# Allegro board Proto-board-silk.brd
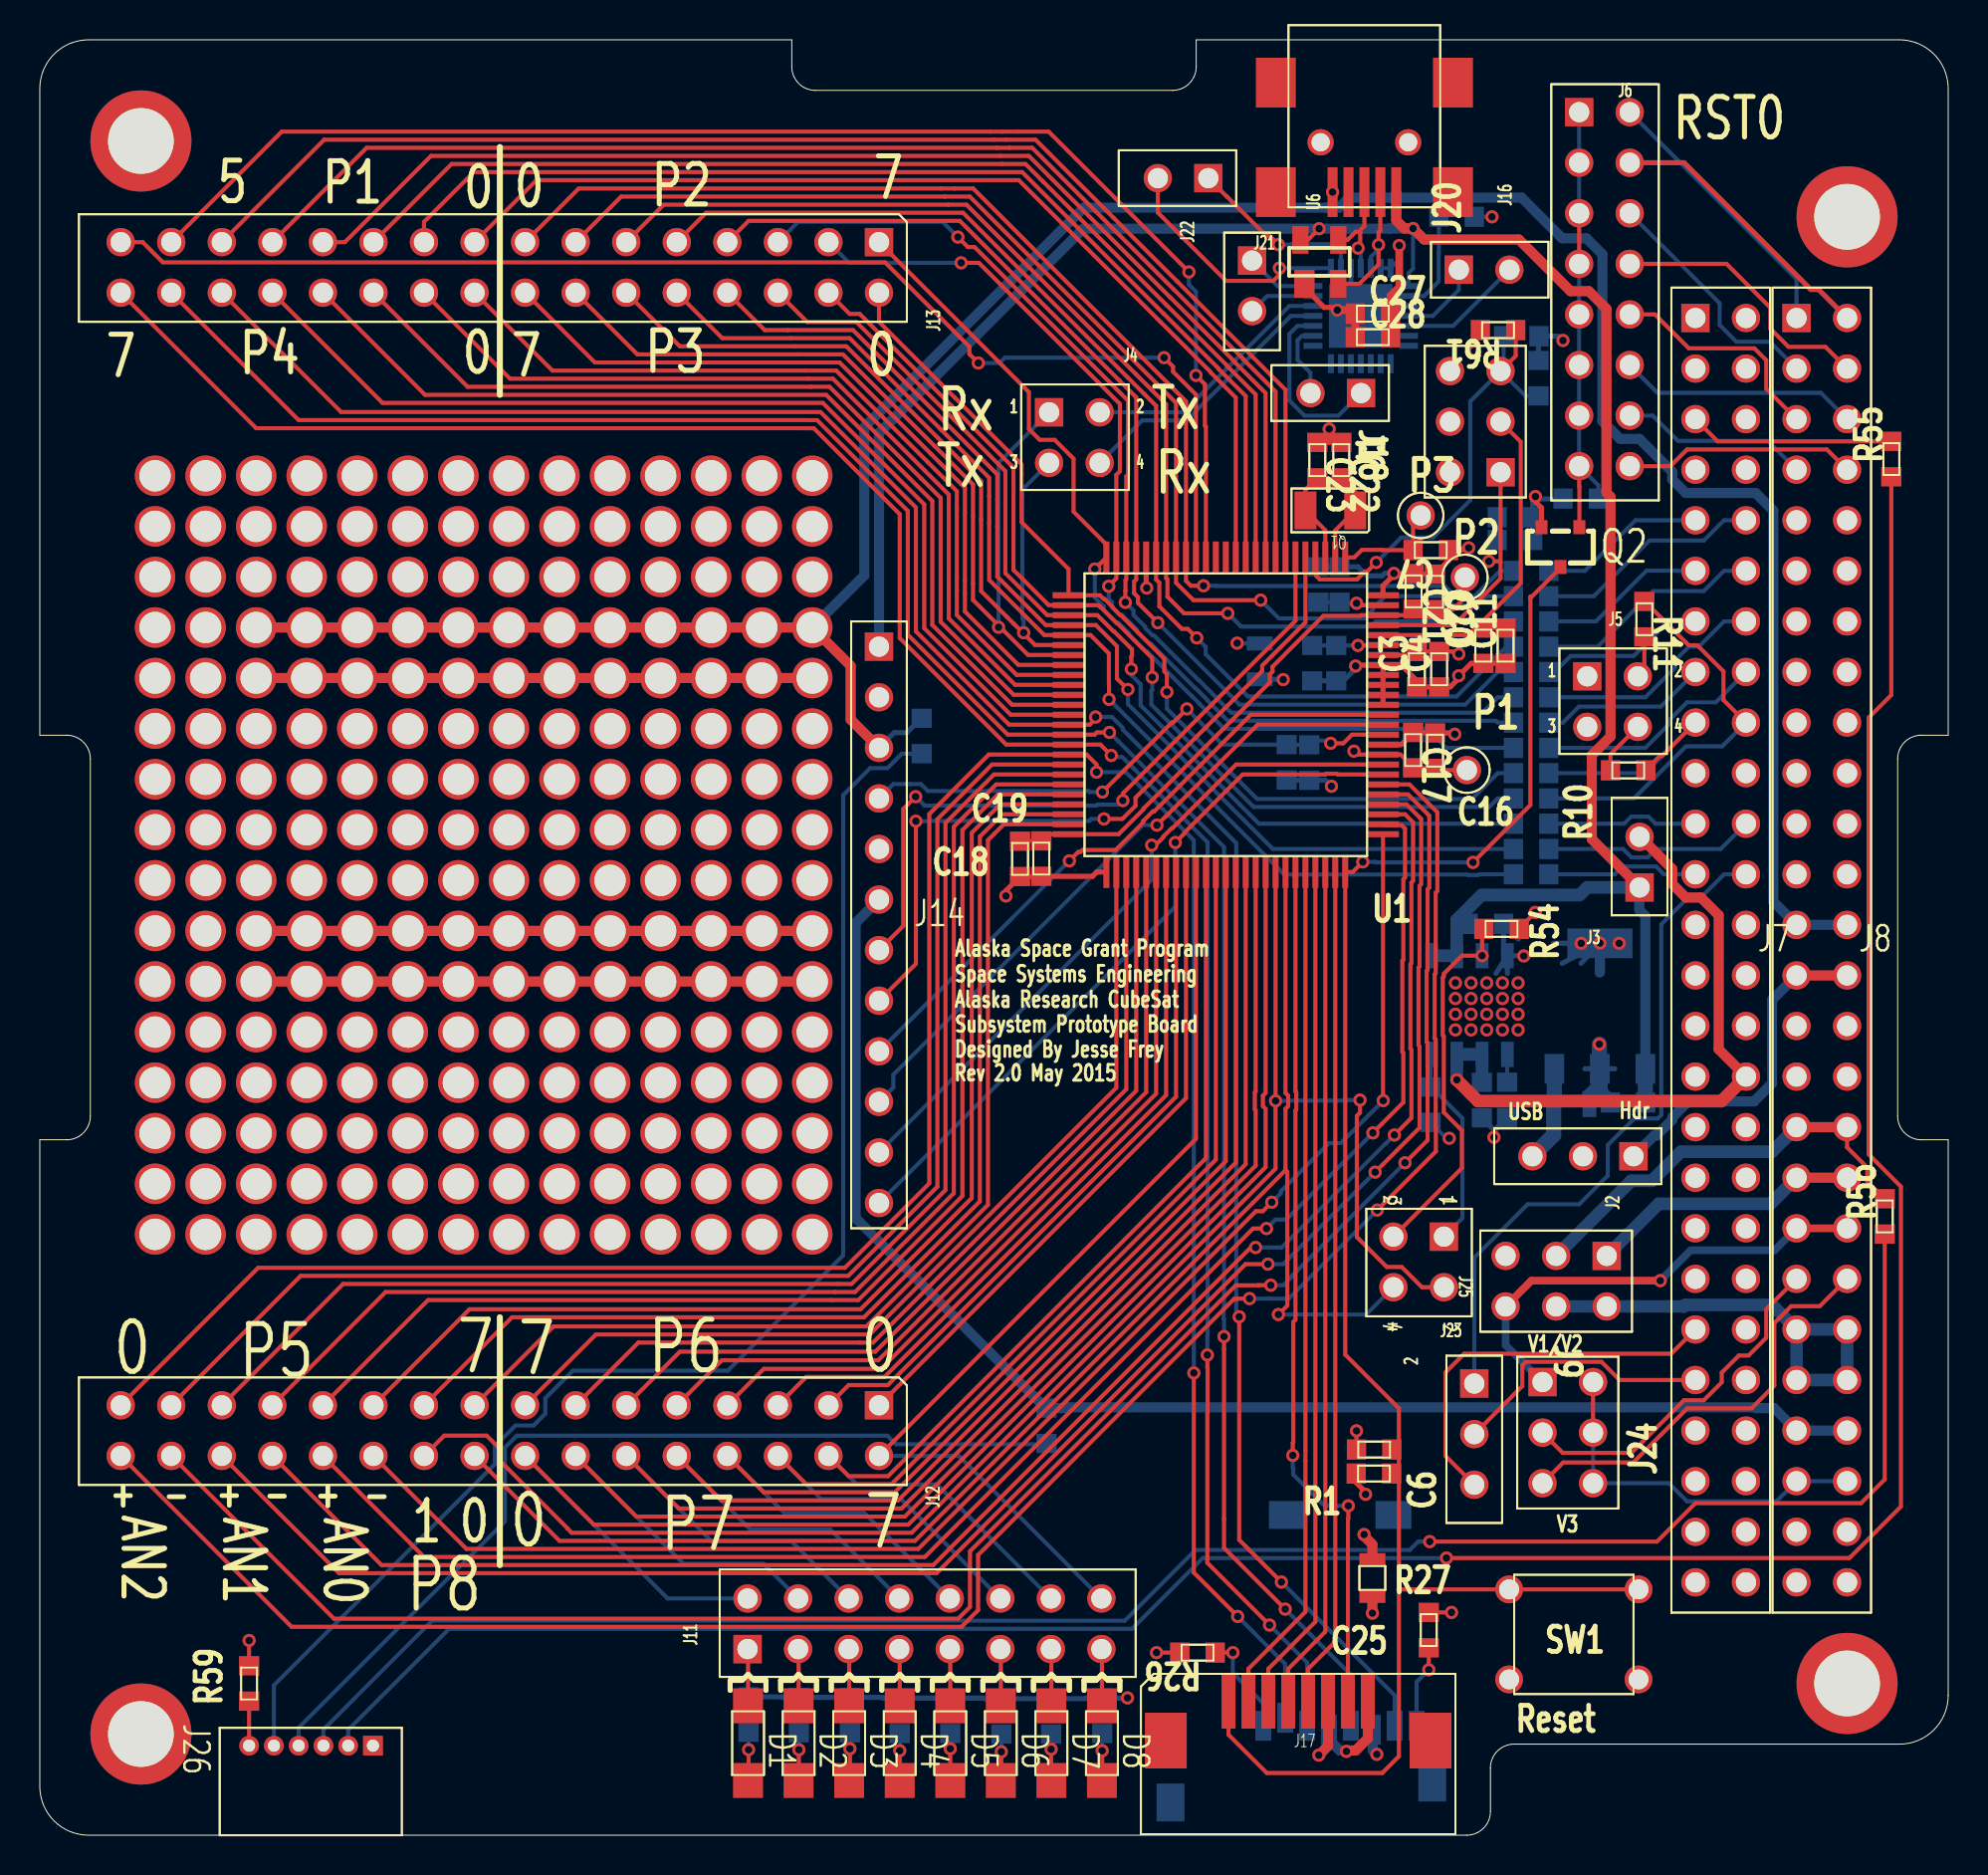
[diagram p0: board, top side]
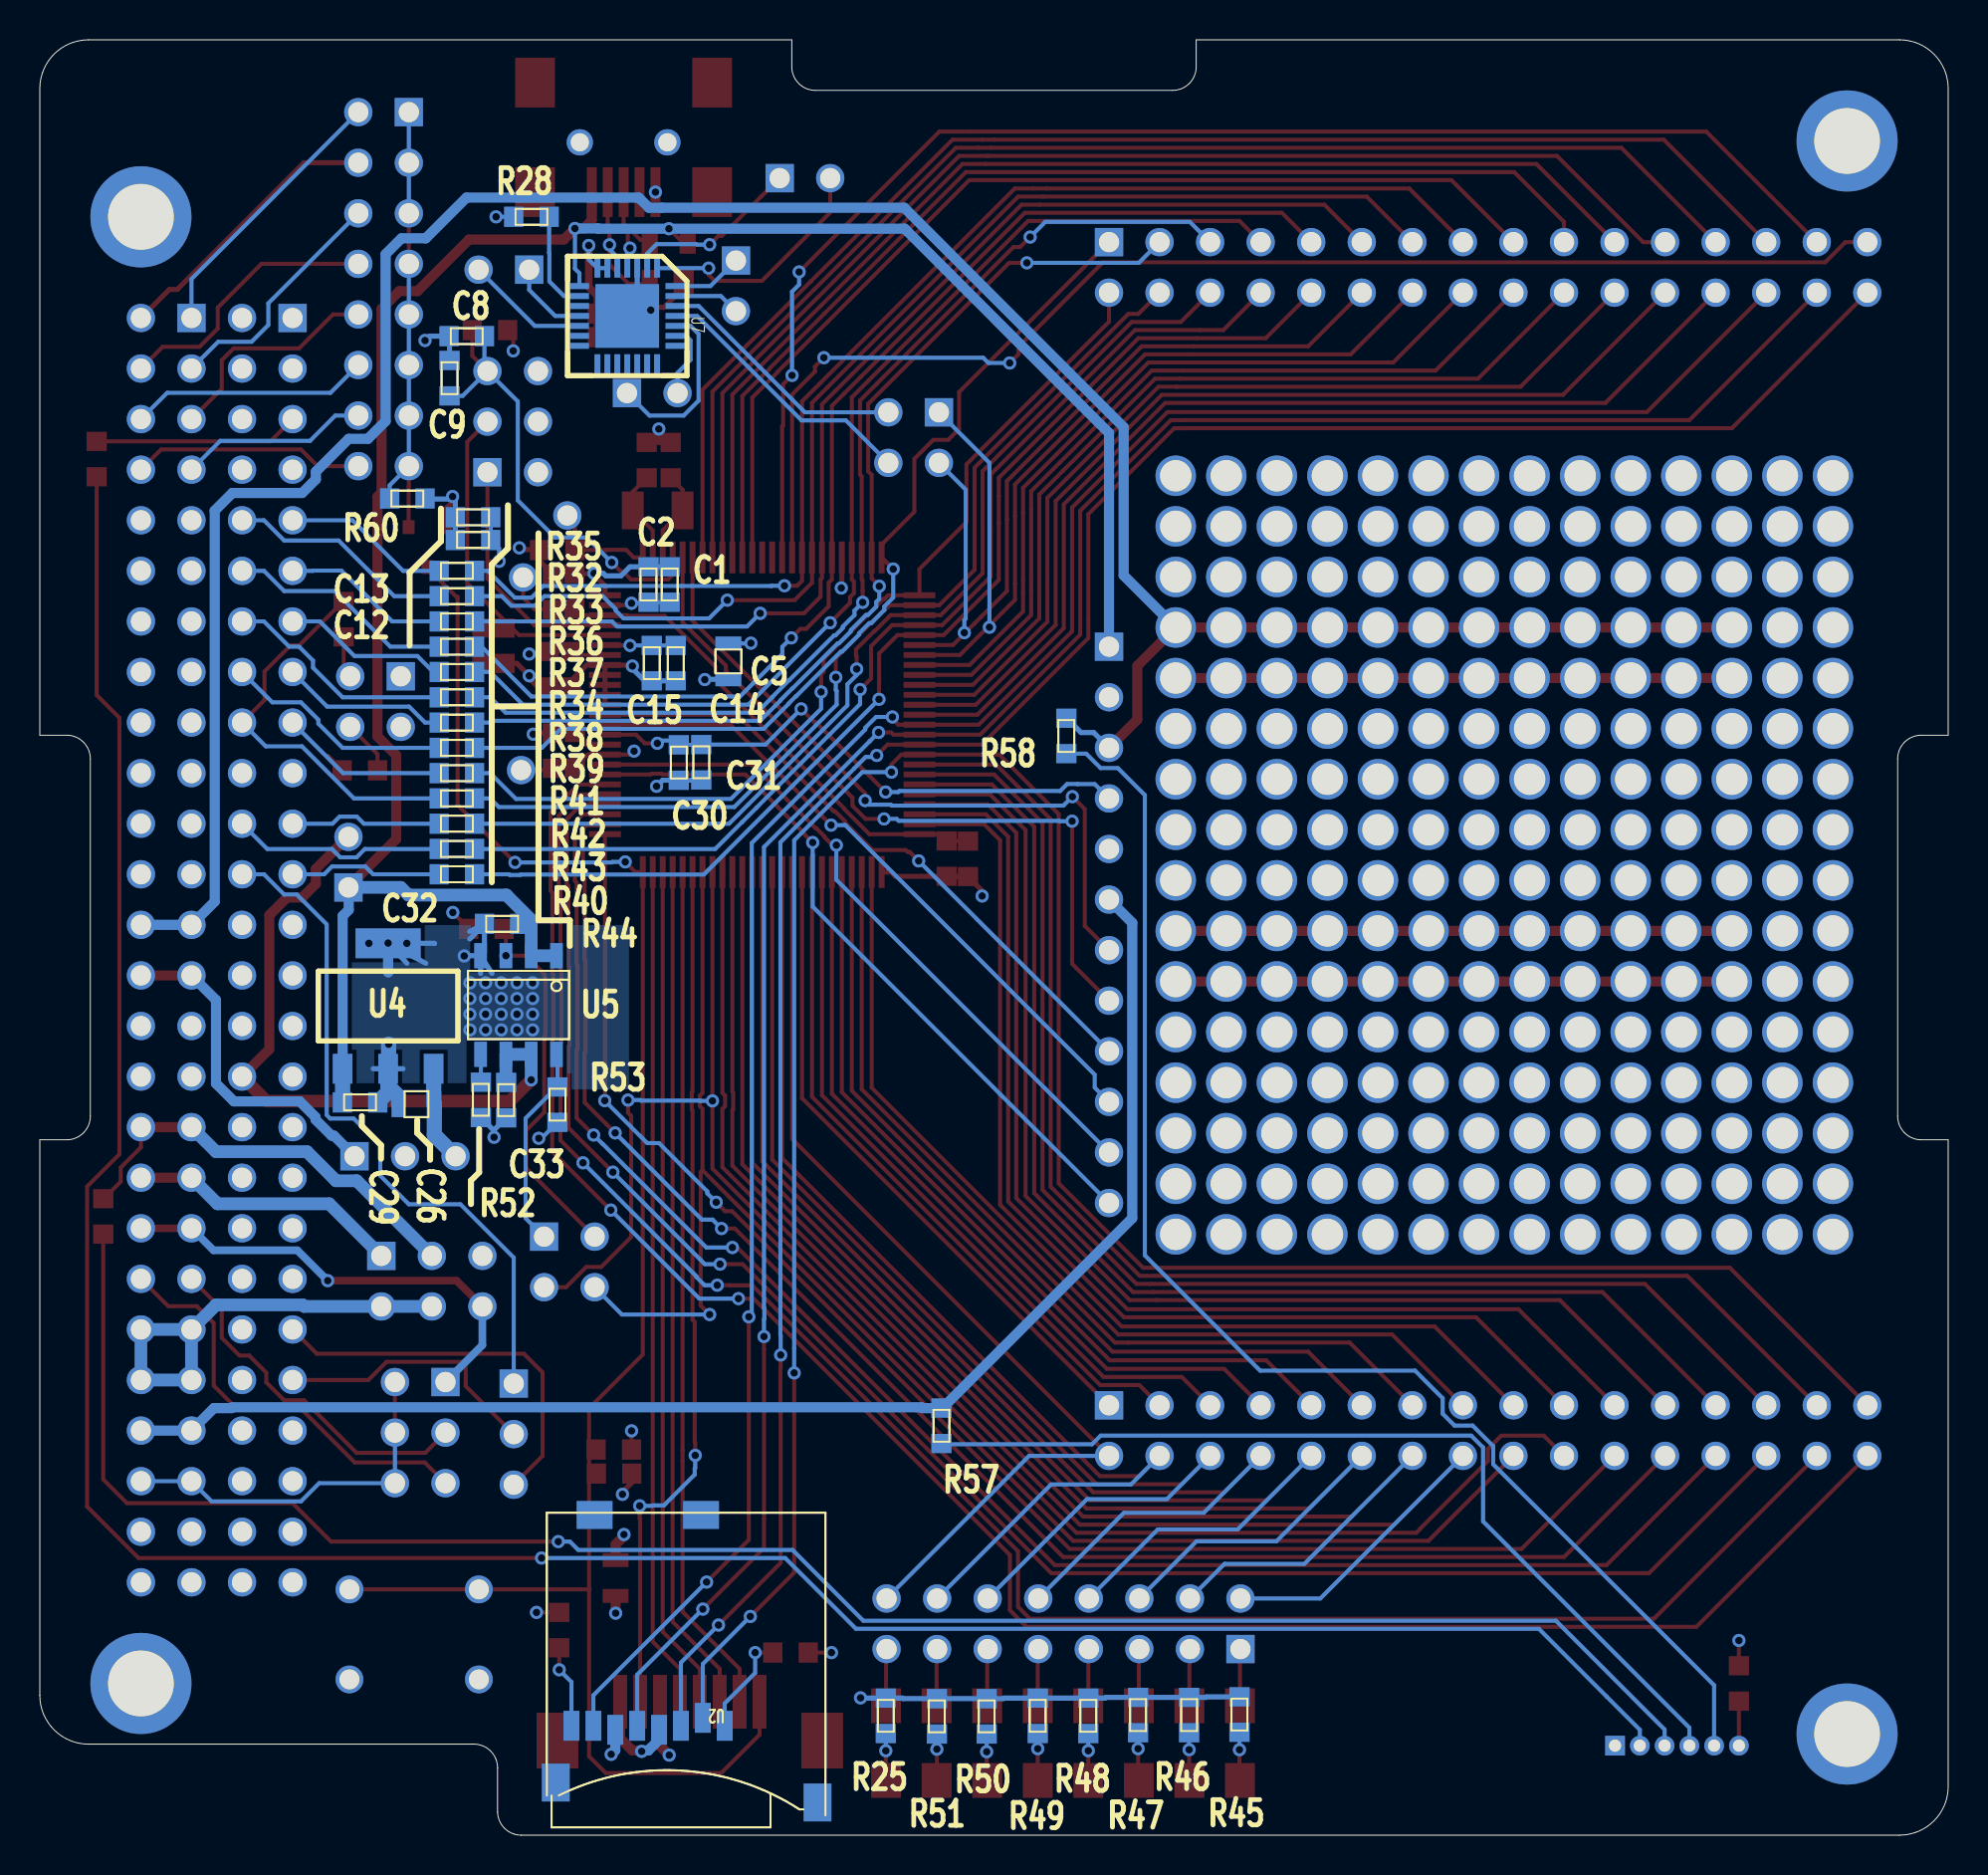
[diagram p1: board, bottom side, seen from below]

Outline 95.89 x 90.17 mm; copper layers: TOP, GND, VCC, BOTTOM. Coordinates in mm from the lower left corner of the outline.

## Design rules (mm)
nets with their own width: min track width 0.254; nets +5V GND N6320719 PWR_GND VBATT
nets with their own width: min track width 0.381; nets BATT_POS BCR_OUT DUMMY_LOAD PCM_IN

## Placement (name value [footprint] x y rotation side)
C1  4.7u  [C0603]  64.24 62.81 270 bottom
C2  0.1u  [C0603]  65.3 62.81 270 bottom
C3  0.1u  [C0603]  69.19 58.56 90 top
C4  4.7u  [C0603]  70.31 58.56 90 top
C5  10uF  [C0805]  61.29 58.95 90 bottom
C6  10n  [C0603]  67.03 18.16 0 top
C7  0.47u  [C0603]  69.89 64.54 180 top
C8  0.1u  [C0603]  74.43 75.29 180 bottom
C9  0.47u  [C0603]  75.3 73.18 270 bottom
C10  0.1u  [C0603]  72.53 59.74 90 top
C11  4.7u  [C0603]  73.65 59.74 90 top
C12  0.1u  [C0603]  74.12 65.05 180 bottom
C13  4.7u  [C0603]  74.12 66.19 180 bottom
C14  4.7u  [C0603]  63.93 58.86 90 bottom
C15  0.1u  [C0603]  65.14 58.86 90 bottom
C16  4.7u  [C0603]  70.1 54.47 270 top
C17  0.1u  [C0603]  69 54.5 270 top
C18  4.7u  [C0603]  49.25 49.03 90 top
C19  0.1u  [C0603]  50.32 49.05 90 top
C20  4.7u  [C0603]  70.1 62.45 270 top
C21  0.1u  [C0603]  69.02 62.47 270 top
C22  24p  [C0603]  65.39 69.06 270 top
C23  24p  [C0603]  64.19 69.06 270 top
C25  10uF  [C0805]  66.95 12.92 270 top
C26  22u  [C0805]  76.96 36.72 180 bottom
C27  100nF  [C0603]  66.98 76.42 0 top
C28  4.7u  [C0603]  66.98 75.23 0 top
C29  0.1u  [C0603]  79.79 36.8 0 bottom
C30  0.1u  [C0603]  63.78 53.87 90 bottom
C31  4.7u  [C0603]  62.65 53.89 90 bottom
C32  2.2u  [C0603]  72.66 45.77 180 bottom
C33  0.1u  [C0603]  72.45 36.92 90 bottom
D1  Red  [D1206]  35.59 4.62 270 top
D2  Orange  [D1206]  38.13 4.62 270 top
D3  Green  [D1206]  40.67 4.62 270 top
D4  Yellow  [D1206]  43.21 4.62 270 top
D5  Red  [D1206]  45.75 4.62 270 top
D6  Orange  [D1206]  48.29 4.62 270 top
D7  Green  [D1206]  50.83 4.62 270 top
D8  Yellow  [D1206]  53.37 4.62 270 top
J1  -  [CON6A]  72.12 70.99 180 top
J2  -  [CON3]  80.07 34.1 270 top
J3  -  [CON2AP]  80.38 47.6 180 top
J4  -  [CON4A]  50.71 71.46 0 top
J5  -  [CON4A]  77.75 58.2 0 top
J6  -  [CON16A]  77.34 86.54 0 top
J7  52 pin  [SSQ-126-D]  83.19 76.2 0 top
J8  52 pin  [SSQ-126-D]  88.27 76.2 0 top
J9  -  [CON6A]  76.19 27.83 270 top
J11  -  [CON16A]  35.56 9.35 90 top
J12  -  [CON32A]  42.16 21.59 270 top
J13  -  [CON32A]  42.16 80.01 270 top
J14  -  [CON12]  42.16 59.69 0 top
J16  Mini USB  [MINIUSBCONNSMD]  62.1 90.27 270 top
J17  CON8  [FPC_CONN_52207-0819]  59.73 6.7 0 top
J18  -  [CON2]  66.38 72.43 270 top
J20  -  [CON2]  71.3 78.63 90 top
J21  -  [CON2]  60.91 79.08 0 top
J22  -  [CON2]  58.71 83.22 270 top
J23  -  [CON3]  72.07 22.68 0 top
J24  -  [CON6A]  76.77 20.22 0 top
J25  -  [CON4A]  70.55 30.06 270 top
J26  CON6  [DF13-6P-125DS]  16.74 4.5 270 top
NOREF  -  []  203.2 114.3 0 top
NOREF#2  -  [unnamed#2]  5.08 5.08 0 top
NOREF#3  -  []  -60.96 -81.28 0 top
P1  TP  [TEST_PIN]  71.7 53.49 0 top
P2  TP  [TEST_PIN]  71.6 63.17 0 top
P3  TP  [TEST_PIN]  69.38 66.28 0 top
Q1  32.768kHz  [ECX-31B]  66.09 66.54 180 top
Q2  3.5A  [SOT23]  76.4 64.69 0 top
R1  47k  [R0603]  67.04 19.37 180 top
R10  10k  [R0603]  79.81 53.48 180 top
R11  10k  [R0603]  80.62 61.07 270 top
R25  1k  [R0603]  53.38 5.99 270 bottom
R26  100k  [R0603]  58.17 9.17 180 top
R27  100k  [R0603]  69.79 10.3 90 top
R28  4.7k  [R0603]  71.18 81.28 0 bottom
R32  120  [R0603]  74.93 62.23 180 bottom
R33  120  [R0603]  74.93 60.96 180 bottom
R34  120  [R0603]  74.93 57.15 180 bottom
R35  120  [R0603]  74.93 63.5 180 bottom
R36  120  [R0603]  74.93 59.69 180 bottom
R37  120  [R0603]  74.93 58.42 180 bottom
R38  120  [R0603]  74.93 55.88 180 bottom
R39  120  [R0603]  74.93 54.61 180 bottom
R40  120  [R0603]  74.93 49.53 180 bottom
R41  120  [R0603]  74.93 53.34 180 bottom
R42  120  [R0603]  74.93 52.07 180 bottom
R43  120  [R0603]  74.93 50.8 180 bottom
R44  120  [R0603]  74.93 48.26 180 bottom
R45  1k  [R0603]  35.61 6.06 270 bottom
R46  1k  [R0603]  38.14 6.03 270 bottom
R47  1k  [R0603]  40.7 6.03 270 bottom
R48  1k  [R0603]  43.21 5.99 270 bottom
R49  1k  [R0603]  45.75 5.99 270 bottom
R50  1k  [R0603]  48.31 5.97 270 bottom
R51  1k  [R0603]  50.81 5.97 270 bottom
R52  4.7k  [R0603]  73.72 36.93 90 bottom
R53  47k  [R0603]  69.88 36.69 270 bottom
R54  47k  [R0603]  73.44 45.52 0 top
R55  10k  [R0603]  93.03 69.11 90 top
R56  10k  [R0603]  92.7 31.08 90 top
R57  10k  [R0603]  50.58 20.56 90 bottom
R58  10k  [R0603]  44.31 55.21 90 bottom
R59  10k  [R0603]  10.52 7.62 90 top
R60  47k  [R0603]  77.42 67.13 0 bottom
R61  0.0  [R0603]  73.27 75.59 180 top
SW1  -  [SW_PB]  77.08 10.08 180 top
U1  MSP430F6779A  [100LQFP]  59.59 56.27 180 top
U2  -  [USD]  63.41 8.29 0 bottom
U3  -  [PROTO14X16]  38.81 50.5 180 top
U4  3.3V  [SOT_223]  78.38 41.64 180 bottom
U5  MAX893L  [SOIC8]  71.83 41.69 270 bottom
U6  5.5V  [SOT143-4]  64.29 79.02 90 top
U7  CP2102  [5X5MMQFN-28]  66.37 76.3 270 bottom

## Library data of the parts
C1-C23 C25-C33 = C
D1-D8 = LED
J1 J9 J24 = CON6A
J2 J23 = CON3
J3 = CON2AP_0
J4 J5 J25 = CON4A
J6 J11 = CON16A
J7 J8 = CON_2x26
J12 J13 = CON32A
J14 = CON12
J16 = miniUSB
J17 = CON8
J18 J20-J22 = CON2
J26 = CON6
P1-P3 = Test_Pin
Q1 = xtal
Q2 = MOSFET-N
R1 R10 R11 R25-R28 R32-R61 = R
SW1 = SW-PB-TACT
U1 = MSP430F67xxAPN
U2 = micro_sd
U3 = ProtoArea
U4 = MIC5209
U5 = MAX893L: Tolerance: ***; User Part Number: ***
U6 = SP0503
U7 = CP2102

## Footprints (pads in the part's own frame, mm; a bottom-side part is the same pattern mirrored in y, then rotated)
5X5MMQFN-28
  rect 0.95x0.3 smd: 1(-2.4,1.5) 2(-2.4,1) 3(-2.4,0.5) 4(-2.4,0) 5(-2.4,-0.5) 6(-2.4,-1) 7(-2.4,-1.5) 15(2.4,-1.5) 16(2.4,-1) 17(2.4,-0.5) 18(2.4,0) 19(2.4,0.5) 20(2.4,1) 21(2.4,1.5)
  rect 0.3x0.95 smd: 8(-1.5,-2.4) 9(-1,-2.4) 10(-0.5,-2.4) 11(0,-2.4) 12(0.5,-2.4) 13(1,-2.4) 14(1.5,-2.4) 22(1.5,2.4) 23(1,2.4) 24(0.5,2.4) 25(0,2.4) 26(-0.5,2.4) 27(-1,2.4) 28(-1.5,2.4)
  rect 3.2x3.2 smd: PAD(0,0)
100LQFP
  rect 1.6x0.3 smd: 1(-7.9,6) 2(-7.9,5.5) 3(-7.9,5) 4(-7.9,4.5) 5(-7.9,4) 6(-7.9,3.5) 7(-7.9,3) 8(-7.9,2.5) 9(-7.9,2) 10(-7.9,1.5) 11(-7.9,1) 12(-7.9,0.5) 13(-7.9,0) 14(-7.9,-0.5) 15(-7.9,-1) 16(-7.9,-1.5) 17(-7.9,-2) 18(-7.9,-2.5) 19(-7.9,-3) 20(-7.9,-3.5) 21(-7.9,-4) 22(-7.9,-4.5) 23(-7.9,-5) 24(-7.9,-5.5) 25(-7.9,-6) 51(7.9,-6) 52(7.9,-5.5) 53(7.9,-5) 54(7.9,-4.5) 55(7.9,-4) 56(7.9,-3.5) 57(7.9,-3) 58(7.9,-2.5) 59(7.9,-2) 60(7.9,-1.5) 61(7.9,-1) 62(7.9,-0.5) 63(7.9,0) 64(7.9,0.5) 65(7.9,1) 66(7.9,1.5) 67(7.9,2) 68(7.9,2.5) 69(7.9,3) 70(7.9,3.5) 71(7.9,4) 72(7.9,4.5) 73(7.9,5) 74(7.9,5.5) 75(7.9,6)
  rect 0.3x1.6 smd: 26(-6,-7.9) 27(-5.5,-7.9) 28(-5,-7.9) 29(-4.5,-7.9) 30(-4,-7.9) 31(-3.5,-7.9) 32(-3,-7.9) 33(-2.5,-7.9) 34(-2,-7.9) 35(-1.5,-7.9) 36(-1,-7.9) 37(-0.5,-7.9) 38(0,-7.9) 39(0.5,-7.9) 40(1,-7.9) 41(1.5,-7.9) 42(2,-7.9) 43(2.5,-7.9) 44(3,-7.9) 45(3.5,-7.9) 46(4,-7.9) 47(4.5,-7.9) 48(5,-7.9) 49(5.5,-7.9) 50(6,-7.9) 76(6,7.9) 77(5.5,7.9) 78(5,7.9) 79(4.5,7.9) 80(4,7.9) 81(3.5,7.9) 82(3,7.9) 83(2.5,7.9) 84(2,7.9) 85(1.5,7.9) 86(1,7.9) 87(0.5,7.9) 88(0,7.9) 89(-0.5,7.9) 90(-1,7.9) 91(-1.5,7.9) 92(-2,7.9) 93(-2.5,7.9) 94(-3,7.9) 95(-3.5,7.9) 96(-4,7.9) 97(-4.5,7.9) 98(-5,7.9) 99(-5.5,7.9) 100(-6,7.9)
C0603
  rect 0.965x1.016 smd: 1(-0.889,0) 2(0.889,0)
C0805
  rect 0.7x1.3 smd: 1(-0.9,0) 2(0.9,0)
CON2
  rect 1.422x1.422 hole 1.016: 1(0,0)
  round 1.422 hole 1.016: 2(0,-2.54)
CON2AP
  rect 1.422x1.422 hole 1.016: 1(0,0)
  round 1.422 hole 1.016: 2(0,-2.54)
CON3
  rect 1.422x1.422 hole 1.016: 1(0,0)
  round 1.422 hole 1.016: 2(0,-2.54) 3(0,-5.08)
CON4A
  rect 1.422x1.422 hole 1.016: 1(0,0)
  round 1.422 hole 1.016: 2(2.54,0) 3(0,-2.54) 4(2.54,-2.54)
CON6A
  rect 1.422x1.422 hole 1.016: 1(-1.27,2.54)
  round 1.422 hole 1.016: 2(1.27,2.54) 3(-1.27,0) 4(1.27,0) 5(-1.27,-2.54) 6(1.27,-2.54)
CON12
  rect 1.422x1.422 hole 1.016: 1(0,0)
  round 1.422 hole 1.016: 2(0,-2.54) 3(0,-5.08) 4(0,-7.62) 5(0,-10.16) 6(0,-12.7) 7(0,-15.24) 8(0,-17.78) 9(0,-20.32) 10(0,-22.86) 11(0,-25.4) 12(0,-27.94)
CON16A
  rect 1.422x1.422 hole 1.016: 1(0,0)
  round 1.422 hole 1.016: 2(2.54,0) 3(0,-2.54) 4(2.54,-2.54) 5(0,-5.08) 6(2.54,-5.08) 7(0,-7.62) 8(2.54,-7.62) 9(0,-10.16) 10(2.54,-10.16) 11(0,-12.7) 12(2.54,-12.7) 13(0,-15.24) 14(2.54,-15.24) 15(0,-17.78) 16(2.54,-17.78)
CON32A
  rect 1.422x1.422 hole 1.016: 1(0,0)
  round 1.422 hole 1.016: 2(2.54,0) 3(0,-2.54) 4(2.54,-2.54) 5(0,-5.08) 6(2.54,-5.08) 7(0,-7.62) 8(2.54,-7.62) 9(0,-10.16) 10(2.54,-10.16) 11(0,-12.7) 12(2.54,-12.7) 13(0,-15.24) 14(2.54,-15.24) 15(0,-17.78) 16(2.54,-17.78) 17(0,-20.32) 18(2.54,-20.32) 19(0,-22.86) 20(2.54,-22.86) 21(0,-25.4) 22(2.54,-25.4) 23(0,-27.94) 24(2.54,-27.94) 25(0,-30.48) 26(2.54,-30.48) 27(0,-33.02) 28(2.54,-33.02) 29(0,-35.56) 30(2.54,-35.56) 31(0,-38.1) 32(2.54,-38.1)
D1206
  rect 1.75x1.5 smd: 1(-1.875,0) 2(1.875,0)
DF13-6P-125DS
  rect 0.991x0.991 hole 0.61: 1(0,0)
  round 0.991 hole 0.61: 2(0,-1.245) 3(0,-2.489) 4(0,-3.734) 5(0,-4.978) 6(0,-6.223)
ECX-31B
  rect 1.1x1.9 smd: 1(0,0) 2(2.5,0)
FPC_CONN_52207-0819
  rect 2.1x2.8 smd: (-3.15,-1.95) (10.15,-1.95)
  rect 0.7x2.7 smd: 1(0,0) 2(1,0) 3(2,0) 4(3,0) 5(4,0) 6(5,0) 7(6,0) 8(7,0)
MINIUSBCONNSMD
  rect 2.5x2 smd: (2.25,8.9) (2.25,0) (7.75,8.9) (7.75,0)
  round 1.321 hole 0.914: (5.25,6.65) (5.25,2.25)
  rect 2.5x0.5 smd: 1(7.75,6.05) 2(7.75,5.25) 3(7.75,4.45) 4(7.75,3.65) 5(7.75,2.85)
PROTO14X16
  round 2.032 hole 1.575: (0,20.32) (0,17.78) (0,15.24) (0,12.7) (0,10.16) (0,2.54) (0,0) (0,-2.54) (0,-5.08) (0,-12.7) (0,-15.24) (0,-17.78) (2.54,20.32) (2.54,17.78) (2.54,15.24) (2.54,12.7) (2.54,10.16) (2.54,7.62) (2.54,5.08) (2.54,2.54) (2.54,0) (2.54,-2.54) (2.54,-5.08) (2.54,-7.62) (2.54,-10.16) (2.54,-12.7) (2.54,-15.24) (2.54,-17.78) (5.08,20.32) (5.08,17.78) (5.08,15.24) (5.08,12.7) (5.08,10.16) (5.08,7.62) (5.08,5.08) (5.08,2.54) (5.08,0) (5.08,-2.54) (5.08,-5.08) (5.08,-7.62) (5.08,-10.16) (5.08,-12.7) (5.08,-15.24) (5.08,-17.78) (7.62,20.32) (7.62,17.78) (7.62,15.24) (7.62,12.7) (7.62,10.16) (7.62,7.62) (7.62,5.08) (7.62,2.54) (7.62,0) (7.62,-2.54) (7.62,-5.08) (7.62,-7.62) (7.62,-10.16) (7.62,-12.7) (7.62,-15.24) (7.62,-17.78) (10.16,20.32) (10.16,17.78) (10.16,15.24) (10.16,12.7) (10.16,10.16) (10.16,7.62) (10.16,5.08) (10.16,2.54) (10.16,0) (10.16,-2.54) (10.16,-5.08) (10.16,-7.62) (10.16,-10.16) (10.16,-12.7) (10.16,-15.24) (10.16,-17.78) (12.7,20.32) (12.7,17.78) (12.7,15.24) (12.7,12.7) (12.7,10.16) (12.7,7.62) (12.7,5.08) (12.7,2.54) (12.7,0) (12.7,-2.54) (12.7,-5.08) (12.7,-7.62) (12.7,-10.16) (12.7,-12.7) (12.7,-15.24) (12.7,-17.78) (15.24,20.32) (15.24,17.78) (15.24,15.24) (15.24,12.7) (15.24,10.16) (15.24,7.62) (15.24,5.08) (15.24,2.54) (15.24,0) (15.24,-2.54) (15.24,-5.08) (15.24,-7.62) (15.24,-10.16) (15.24,-12.7) (15.24,-15.24) (15.24,-17.78) (17.78,20.32) (17.78,17.78) (17.78,15.24) (17.78,12.7) (17.78,10.16) (17.78,7.62) (17.78,5.08) (17.78,2.54) (17.78,0) (17.78,-2.54) (17.78,-5.08) (17.78,-7.62) (17.78,-10.16) (17.78,-12.7) (17.78,-15.24) (17.78,-17.78) (20.32,20.32) (20.32,17.78) (20.32,15.24) (20.32,12.7) (20.32,10.16) (20.32,7.62) (20.32,5.08) (20.32,2.54) (20.32,0) (20.32,-2.54) (20.32,-5.08) (20.32,-7.62) (20.32,-10.16) (20.32,-12.7) (20.32,-15.24) (20.32,-17.78) (22.86,20.32) (22.86,17.78) (22.86,15.24) (22.86,12.7) (22.86,10.16) (22.86,7.62) (22.86,5.08) (22.86,2.54) (22.86,0) (22.86,-2.54) (22.86,-5.08) (22.86,-7.62) (22.86,-10.16) (22.86,-12.7) (22.86,-15.24) (22.86,-17.78) (25.4,20.32) (25.4,17.78) (25.4,15.24) (25.4,12.7) (25.4,10.16) (25.4,7.62) (25.4,5.08) (25.4,2.54) (25.4,0) (25.4,-2.54) (25.4,-5.08) (25.4,-7.62) (25.4,-10.16) (25.4,-12.7) (25.4,-15.24) (25.4,-17.78) (27.94,20.32) (27.94,17.78) (27.94,15.24) (27.94,12.7) (27.94,10.16) (27.94,7.62) (27.94,5.08) (27.94,2.54) (27.94,0) (27.94,-2.54) (27.94,-5.08) (27.94,-7.62) (27.94,-10.16) (27.94,-12.7) (27.94,-15.24) (27.94,-17.78) (30.48,20.32) (30.48,17.78) (30.48,15.24) (30.48,12.7) (30.48,10.16) (30.48,7.62) (30.48,5.08) (30.48,2.54) (30.48,0) (30.48,-2.54) (30.48,-5.08) (30.48,-7.62) (30.48,-10.16) (30.48,-12.7) (30.48,-15.24) (30.48,-17.78) (33.02,20.32) (33.02,17.78) (33.02,15.24) (33.02,12.7) (33.02,10.16) (33.02,7.62) (33.02,5.08) (33.02,2.54) (33.02,0) (33.02,-2.54) (33.02,-5.08) (33.02,-7.62) (33.02,-10.16) (33.02,-12.7) (33.02,-15.24) (33.02,-17.78) 1(0,-10.16) 2(0,5.08) 3(0,-7.62) 4(0,7.62)
R0603
  rect 0.965x1.016 smd: 1(-0.889,0) 2(0.889,0)
SOIC8
  rect 1.27x0.635 smd: 1(-2.477,1.905) 2(-2.477,0.635) 3(-2.477,-0.635) 4(-2.477,-1.905) 5(2.477,-1.905) 6(2.477,-0.635) 7(2.477,0.635) 8(2.477,1.905)
SOT23
  rect 0.6x0.7 smd: 1(0.95,1) 2(-0.95,1) 3(0,-1)
SOT143-4
  rect 1.397x1.016 smd: 1(-1.105,0.749)
  rect 1.397x0.813 smd: 2(-1.105,-0.953) 3(1.105,-0.953) 4(1.105,0.953)
SOT_223
  rect 0.991x1.499 smd: 1(-2.286,-3.15) 2(0,-3.15) 3(2.286,-3.15)
  rect 3.277x1.499 smd: TAB(0,3.15)
SSQ-126-D
  rect 1.422x1.422 hole 1.016: 1(0,0)
  round 1.422 hole 1.016: 2(2.54,0) 3(0,-2.54) 4(2.54,-2.54) 5(0,-5.08) 6(2.54,-5.08) 7(0,-7.62) 8(2.54,-7.62) 9(0,-10.16) 10(2.54,-10.16) 11(0,-12.7) 12(2.54,-12.7) 13(0,-15.24) 14(2.54,-15.24) 15(0,-17.78) 16(2.54,-17.78) 17(0,-20.32) 18(2.54,-20.32) 19(0,-22.86) 20(2.54,-22.86) 21(0,-25.4) 22(2.54,-25.4) 23(0,-27.94) 24(2.54,-27.94) 25(0,-30.48) 26(2.54,-30.48) 27(0,-33.02) 28(2.54,-33.02) 29(0,-35.56) 30(2.54,-35.56) 31(0,-38.1) 32(2.54,-38.1) 33(0,-40.64) 34(2.54,-40.64) 35(0,-43.18) 36(2.54,-43.18) 37(0,-45.72) 38(2.54,-45.72) 39(0,-48.26) 40(2.54,-48.26) 41(0,-50.8) 42(2.54,-50.8) 43(0,-53.34) 44(2.54,-53.34) 45(0,-55.88) 46(2.54,-55.88) 47(0,-58.42) 48(2.54,-58.42) 49(0,-60.96) 50(2.54,-60.96) 51(0,-63.5) 52(2.54,-63.5)
SW_PB
  round 1.397 hole 1: 1(-3.251,2.261) 2(-3.251,-2.261) 3(3.251,-2.261) 4(3.251,2.261)
TEST_PIN
  round 1.422 hole 1.016: 1(0,0)
unnamed#2
  round 5.08 hole 3.302: (0,80.01) (0,0) (85.725,76.2) (85.725,2.54)
USD
  rect 1.4x1.9 smd: (-6.6,6.65) (6.55,5.65)
  rect 1.8x1.4 smd: (-0.75,-7.79) (4.6,-7.79)
  rect 0.8x1.5 smd: 1(-1.94,2.8) 2(-0.84,2.4) 3(0.26,2.8) 4(1.36,3) 5(2.46,2.8) 6(3.56,3) 7(4.66,2.8) 8(5.76,2.8)

## Nets
3.3V: C1.2 C2.2 C3.2 C4.2 C5.2 C25.2 C27.2 C28.2 J2.2 J5.1 J5.3 J14.5 J17.8 R1.2 R26.2 R27.2 R28.2 R53.2 R54.2 R59.2 R61.2 U1.19(AVCC) U1.24(DVCC) U2.4(VDD) U3.2(3.3V) U7.6(VDD) U7.7(REGIN)
+5V: J8.25 J8.26 J14.3 R58.2 U3.1(5V)
GND: C1.1 C2.1 C3.1 C4.1 C5.1 C6.1 C7.1 C8.1 C9.1 C10.1 C11.1 C12.1 C13.1 C14.1 C15.1 C16.1 C17.1 C18.1 C19.1 C20.1 C21.1 C22.1 C23.1 C25.1 C26.1 C27.1 C28.1 C29.1 C30.1 C31.1 C32.1 C33.1 J1.2 J1.4 J1.6 J8.30 J14.2 J16.5(GND) J17.6 J26.1 Q2.2(SOURCE) R25.1 R45.1 R46.1 R47.1 R48.1 R49.1 R50.1 R51.1 R52.1 R60.1 SW1.1 SW1.4 U1.10(AVSS2) U1.14(SD5P0) U1.15(SD5N0) U1.16(SD6P0) U1.17(SD6N0) U1.18(AVSS1) U1.25(DVSS1) U1.46(LCDCAP/R33) U1.76(DVSS2) U2.6(VSS) U3.3(GND1) U3.4(GND2) U4.2(GND) U4.TAB(TGND) U5.4(GND) U6.1(C) U7.3(GND) U7.PAD
VBATT: J8.45 J8.46 J14.6 R57.2
AN00: J12.22 U1.1(SD0P0)
AN01: J12.24 U1.2(SD0N0)
AN10: J12.26 U1.3(SD1P0)
AN11: J12.28 U1.4(SD1N0)
AN20: J12.30 U1.5(SD2P0)
AN21: J12.32 U1.6(SD2N0)
AN30: J14.12 U1.7(SD3P0)
AN31: J14.11 U1.8(SD3N0)
AN40: J14.10 U1.12(SD4P0)
AN41: J14.9 U1.13(SD4N0)
AUXVCC1: C12.2 C13.2 J1.1 U1.22(AUXVCC1)
AUXVCC2: C10.2 C11.2 J1.3 U1.21(AUXVCC2)
AUXVCC3: C8.2 C9.2 J1.5 R61.1 U1.29(AUXVCC3)
BATT_POS: J8.33 J8.34 J9.3 R56.2
BCR_OUT: J8.41 J8.42 J8.43 J8.44 J9.2 J9.4
BURN: J7.5 R55.2
BUS-INT0: J7.9 R35.1
BUS-INT1: J7.10 R32.1
BUS-INT2: J7.11 R33.1
BUS-INT3: J7.12 R36.1
BUS-INT4: J7.13 R37.1
BUS-INT5: J7.14 R34.1
BUS-INT6: J7.15 R38.1
BUS-INT7: J7.16 R39.1
D-BUS0: J7.17 R10.1 R41.1
D-BUS1: J7.18 R11.1 R42.1
D-BUS2: J7.21 R43.1
D-BUS3: J7.22 R40.1
D-BUS4: J7.23 R44.1
DUMMY_LOAD: J8.37 J8.38 J9.6 J24.1
I2C-ON: J7.24 J23.1
MEM-SPI0: J13.32 U1.66(P4.7/PM_TA3.0/S25) U2.3(CMD)
MEM-SPI1: J13.28 U1.64(P4.5/PM_UCB1SIMO/PM_UCB1SDA/S27) U2.7(DAT0)
MEM-SPI2: J13.30 U1.65(P4.6/PM_UCB1CLK/S26) U2.5(CLK)
P7.0: J11.2 J12.16 U1.92(P7.7/S1)
P7.1: J11.4 J12.14 U1.91(P7.6/S2)
P7.2: J11.6 J12.12 U1.90(P7.5/S3)
P7.3: J11.8 J12.10 U1.89(P7.4/S4)
P7.4: J11.10 J12.8 U1.88(P7.3/S5)
P7.5: J11.12 J12.6 U1.87(P7.2/S6)
P7.6: J11.14 J12.4 U1.86(P7.1/S7)
P7.7: J11.16 J12.2 U1.85(P7.0/S8)
P8.0: J12.18 J25.4 U1.94(P8.1/TACLK/RTCCLK/CB3)
P8.1: J12.20 J25.2 U1.93(P8.0/S0)
P10: J13.17 U1.37(P1.0/TA1.1/VEREF-/A0)
P11: J13.19 U1.36(P1.1/TA2.1/CBOUT/VEREF+/A1)
P12: J13.21 U1.35(P1.2/ACLK/A2)
P13: J13.23 U1.34(P1.3/ADC10CLK/A3)
P14: J13.25 U1.33(P1.4/MCLK/CB1/A4)
P15: J13.27 U1.32(P1.5/SMCLK/CB0/A5)
P16: J13.29 U1.40(P1.6/COM2)
P17: J13.31 U1.41(P1.7/COM3)
P20: J13.15 R35.2 U1.42(P2.0/PM_TA0.0/BSL_TX/COM4)
P21: J13.13 R32.2 U1.43(P2.1/PM_TA0.1/BSL_RX/COM5)
P22: J13.11 R33.2 U1.44(P2.2/PM_TA0.2/COM6)
P23: J13.9 R36.2 U1.45(P2.3/PM_TA1.0/COM7)
P24: J13.7 R37.2 U1.47(P2.4/PM_TA2.0/R23)
P25: J13.5 R34.2 U1.48(P2.5/PM_UCB0SOMI/PM_UCB0SCL/LCD)
P26: J13.3 R38.2 U1.49(P2.6/PM_UCB0SIMO/PM_UCB0SDA/R03)
P27: J13.1 R39.2 U1.50(P2.7/PM_UCB0CLK/CB2)
P30: J13.2 R41.2 U1.51(P3.0/PM_UCA0RXD/PM_UCA0SOMI)
P31: J13.4 R42.2 U1.52(P3.1/PM_UCA0TXD/PM_UCA0SIMO/S39)
P32: J13.6 R43.2 U1.53(P3.2/PM_UCA0CLK/S38)
P33: J13.8 R40.2 U1.54(P3.3/PM_UCA1CLK/S37)
P34: J13.10 R44.2 U1.55(P3.4/PM_UCA1RXD/PM_UCA1SOMI/S36)
P37: J13.16 U1.58(P3.7/PM_UCA2TXD/PM_UCA2SIMO/S33)
P40: J13.18 U1.59(P4.0/PM_UCA2CLK/S32)
P41: J13.20 U1.60(P4.1/PM_UCA3RXD/PM_UCA3SOMI/S31)
P42: J13.22 U1.61(P4.2/PM_UCA3TXD/PM_UCA3SIMO/S30)
P43: J13.24 U1.62(P4.3/PM_UCA3CLK/S29)
P44: J13.26 U1.63(P4.4/PM_UCB1SOMI/PM_UCB1SCL/S28)
P51: J12.29 U1.68(P5.1/PM_SD0DIO/S23)
P52: J12.27 U1.69(P5.2/PM_SD1DIO/S22)
P53: J12.25 U1.70(P5.3/PM_SD2DIO/S21)
P54: J12.23 U1.71(P5.4/PM_SD3DIO/S20)
P55: J12.21 U1.72(P5.5/PM_SD4DIO/S19)
P56: J12.19 U1.73(P5.6/PM_SD5DIO/S18)
P57: J12.17 U1.74(P5.7/PM_SD6DIO/S17)
P60: J12.1 U1.84(P6.7/S9)
P61: J12.3 U1.83(P6.6/S10)
P62: J12.5 U1.82(P6.5/S11)
P63: J12.7 U1.81(P6.4/S12)
P64: J12.9 U1.80(P6.3/S13)
P65: J12.11 U1.79(P6.2/S14)
P66: J12.13 U1.78(P6.1/S15)
P67: J12.15 U1.77(P6.0/S16)
P-I2C-SCL: J7.43 J23.2
P-I2C-SDA: J7.41 J23.3
PCM_IN: J8.35 J8.36 J9.1
PWR_GND: J8.32
RESET: C6.2 J17.1 Q2.3(DRAIN) R1.1 SW1.2 SW1.3 U1.100(RST/NMI/SBWTDIO)
RST0: J6.2 J8.1
RST1: J6.4 J8.2
RST2: J6.6 J8.3
RST3: J6.8 J8.4
RST4: J6.10 J8.5
RST5: J6.12 J8.6
RST6: J6.14 J8.7
RST7: J6.16 J8.8
RTCAP0: J14.7 U1.31(RTCCAP0)
RTCAP1: J14.8 U1.30(RTCCAP1)
SEP_SW1: J8.39 J24.3
SEP_SW2: J8.40 J24.5
SW_GND: J8.47 J8.48 J24.2 J24.4 J24.6
TCK: J17.5 U1.99(PJ.3/TCK)
TDI/TCLK: J17.3 U1.97(PJ.1/TDI/TCLK)
TDO/TDI: J17.2 U1.96(PJ.0/TDO)
TMS: J17.4 U1.98(PJ.2/TMS)
N00960: D8.1(ANODE) J11.15
N00962: D7.1(ANODE) J11.13
N01405: R28.1 U7.9(RST)
N05444: D6.1(ANODE) J11.11
N09582: D5.1(ANODE) J11.9
N09723: D4.1(ANODE) J11.7
N09975: D3.1(ANODE) J11.5
N10395: D2.1(ANODE) J11.3
N10583: D1.1(ANODE) J11.1
N20705: D8.2(CATHODE) R25.2
N20707: D7.2(CATHODE) R51.2
N20709: D6.2(CATHODE) R50.2
N20711: D5.2(CATHODE) R49.2
N20713: D4.2(CATHODE) R48.2
N20715: D3.2(CATHODE) R47.2
N20717: D2.2(CATHODE) R46.2
N20719: D1.2(CATHODE) R45.2
N4790561: C23.2 Q1.2 U1.28(XOUT)
N4790859: C22.2 Q1.1 U1.27(XIN)
N5907204: J6.1 J6.3 J6.5 J6.7 J6.9 J6.11 J6.13 J6.15 Q2.1(GATE) R60.2
N5929899: J16.2(D-) U6.2(A1) U7.5(D-)
N5929949: J16.3(D+) U6.3(A2) U7.4(D+)
N5932830: J18.2 U7.23(CTS)
N5932842: J18.1 U7.24(RTS)
N5932854: J21.2 U7.27(DSR)
N5932866: J21.1 U7.28(DTR)
N5932918: J22.2 U7.1(DCD)
N5932930: J22.1 U7.2(RI)
N5932942: J20.2 U7.12(SUSPEND)
N5932954: J20.1 U7.11(\\SUSPEND)
N6193207: J4.4 U7.25(RXD)
N6193209: J4.2 U7.26(TXD)
N6197446: J4.3 J13.12 U1.56(P3.5/PM_UCA1TXD/PM_UCA1SIMO/S35)
N6197448: J4.1 J13.14 U1.57(P3.6/PM_UCA2RXD/PM_UCA2SOMI/S34)
N6228204: C26.2 J2.3 U4.3(OUT)
N6242345: J25.3 R54.1 U5.3(O\N\)
N6242401: R52.2 U5.5(SET)
N6242514: J25.1 R53.1 U5.8(F\A\U\L\T\)
N6242904: C29.2 C32.2 J3.1(+) J14.1 J16.1(VCC) U4.1(IN) U5.1(IN1) U5.2(IN2) U6.4(A3) U7.8(VBUS)
N6320719: J2.1 J8.27 J8.28
N6331403: J5.4 R10.2
N6376460: J12.31 U1.67(P5.0/SDCLK/S24) U2.2(CD/DATA3)
N6388535: C30.2 C31.2 J14.4 U1.11(VREF)
N6465997: J5.2 R11.2
N6577771: J17.7 U1.95(TEST/SBWTCK)
N6579172: C7.2 P3.1 U1.26(VCORE)
N6580834: R26.1 U2.1(DAT2)
N6580842: R27.1 U2.8(DAT1)
N6581350: C14.2 C15.2 C16.2 C17.2 P1.1 U1.9(VASYS2) U1.20(VASYS1)
N6581365: C18.2 C19.2 C20.2 C21.2 P2.1 U1.23(VDSYS1) U1.75(VDSYS2)
N6595593: J26.6 R59.1
N6595699: J26.5 R58.1
N6595749: J26.4 R57.1
N6595809: J26.3 R56.1
N6595827: J26.2 R55.1
N6608157: C33.2 J3.2(++) J7.32 U5.6(OUT1) U5.7(OUT2)

Pads without a net: J7 1 2 3 4 6 7 8 19 20 25 26 27 28 29 30 31 33 34 35 36 37 38 39 40 42 44 45 46 47 48 49 50 51 52; J8 9 10 11 12 13 14 15 16 17 18 19 20 21 22 23 24 29 31 49 50 51 52; J9 5; J16 4; U1 38 39; U7 10 13 14 15 16 17 18 19 20 21 22

## Via types
v1: diameter 0.66, hole 0.381, TOP to BOTTOM, 147 vias

## Routing (per net, layer and track width the routed paths; a pad name or vN(x,y) marks a point on that pad's centre or on a via; arc(x,y) is an arc through that point)
3.3V: length 75.6
  TOP w0.203: R27.2 v1(70.93,11.19) ; R1.2 v1(66.15,20.31) ; U1.19 69.01,59.27 C3.2 C4.2 70.98,59.45 71.11,59.32 v1(71.3,59.32) ; v1(66.16,61.87) 66.35,61.87 66.45,61.77 U1.24 ; v1(75.13,46.34) 74.33,45.54 R54.2 ; v1(72.1,74.55) 72.1,75.31 R61.2 ; R26.2 v1(56.11,9.17) ; 10.52,8.51 v1(10.52,9.78)
  TOP w0.381: v1(68.3,79.84) 68.3,77.75 67.87,77.32 C27.2 C28.2
  TOP w0.508: J17.8 66.73,4.86 66.12,4.25 65.69,4.25 v1(65.65,4.21) ; v1(66.95,11.15) C25.2 ; 10.87,45.42 U3.2
  VCC w0.203: 76.78,55.66 J5.3 ; J5.3 77.75,56.63 ; J5.3 77.75,54.7 ; J5.3 78.72,55.66 ; 77.53,33.13 J2.2 ; J2.2 77.53,35.07 ; J2.2 78.5,34.1 ; J2.2 76.57,34.1 ; 77.75,57.24 J5.1 ; J5.1 78.72,58.2 ; J5.1 77.75,59.17 ; J5.1 76.78,58.2 ; J14.5 43.13,49.53 ; J14.5 42.16,48.56 ; J14.5 41.2,49.53 ; J14.5 42.16,50.5 ; 39.74,46.35 U3.2 40.06,45.42
  BOTTOM w0.203: C1.2 C2.2 65.36,61.87 v1(66.16,61.87) ; U7.6 U7.7 68.3,79.14 v1(68.3,79.84) ; C5.2 60.28,59.85 60.26,59.87 v1(60.16,59.87) ; v1(70.82,35) 70.68,35 R53.2 ; R28.2 v1(72.96,81.28)
  BOTTOM w0.508: U2.4 64.77,4.8 65.31,4.25 65.6,4.25 v1(65.65,4.21)
+5V: length 135.2
  TOP w0.508: 10.87,60.66 U3.1 40.74,58.72 40.74,56.03 J14.3
  BOTTOM w0.254: J14.3 42.93,55.38 43.57,55.38 44.28,56.1 R58.2
  BOTTOM w0.508: U3.1 41.43,63.27 41.43,70.71 52.45,81.74 64.62,81.74 64.63,81.73 65.28,81.73 65.79,82.25 74.45,82.25 76.49,80.2 77.71,80.2 78.51,79.4 78.51,71.02 79.4,70.13 80.37,70.13 82.02,68.48 82.02,68.1 82.7,67.41 86.21,67.41 87.1,66.52 87.1,46.89 J8.25 90.8,45.72
GND: length 196.7
  TOP w0.254: v1(65.19,76.59) 65.05,76.73 64.53,76.73 63.54,77.72 U6.1 ; U1.18 U1.17 U1.16 U1.15 U1.14 ; U1.18 68.41,58.77 69.19,57.99 C3.1 C4.1 70.87,57.67 71.27,58.08 71.27,58.21 v1(71.29,58.23) 71.91,58.85 C10.1 C11.1 ; U1.18 67.48,58.76 66.16,58.76 66.12,58.72 v1(66.11,58.72) ; C6.1 66.14,17.7 66.61,17.23 v1(66.61,17.12) ; 68.03,63.3 67.49,62.75 U1.25 ; 68.03,63.3 v1(68.03,63.37) ; 68.03,63.3 68.09,63.36 C21.1 69.05,63.33 C20.1 70.78,64.01 C7.1 70.8,64.57 71.48,64.57 71.56,64.66 v1(71.79,64.66) ; v1(75.15,67.23) 75.15,66.97 75.45,66.66 Q2.2 ; 64.78,69.95 v1(64.78,70.62) ; 64.78,69.95 C23.1 ; 64.78,69.95 C22.1 ; v1(55.62,62.64) 55.59,62.67 U1.46 ; v1(48.54,47.17) 48.54,47.43 C18.1 50.3,48.15 C19.1 52.89,48.16 53.11,48.37 U1.76 ; U1.10 68.41,54.77 68.62,54.99 68.62,55 C17.1 69.02,55.36 C16.1 71.02,55.36 71.08,55.3 v1(71.09,55.3)
  TOP w0.381: C28.1 C27.1 65.91,76.59 v1(65.19,76.59)
  TOP w0.508: v1(66.54,15.1) 66.54,15.02 66.95,14.61 C25.1 ; v1(64.26,4.02) 64.73,4.48 J17.6 ; U3.4 10.87,42.88 ; U3.3 10.87,58.12
  GND w0.254: 69.89,68.45 J1.2 ; J1.2 70.85,67.49 ; J1.2 71.82,68.45 ; J1.2 70.85,69.42 ; 89.84,40.64 90.8,40.64 ; 90.8,40.64 90.8,41.61 ; 90.8,40.64 90.8,39.67 ; 90.8,40.64 91.77,40.64 ; 42.16,56.18 J14.2 ; J14.2 41.2,57.15 ; J14.2 42.16,58.12 ; J14.2 43.13,57.15 ; 69.89,70.99 J1.4 ; J1.4 70.85,71.96 ; J1.4 70.85,70.03 ; J1.4 71.82,70.99 ; SW1.4 74.78,7.82 ; SW1.4 72.87,7.82 ; SW1.4 73.83,6.87 ; SW1.4 73.83,8.78 ; 70.85,72.57 J1.6 ; J1.6 70.85,74.5 ; J1.6 71.82,73.53 ; J1.6 69.89,73.53 ; 80.33,6.87 SW1.1 ; SW1.1 79.37,7.82 ; SW1.1 80.33,8.78 ; SW1.1 81.28,7.82 ; 40.06,58.12 U3.3 39.74,59.05 ; 39.74,43.81 U3.4 40.06,42.88 ; J26.1 17.49,4.5 ; J26.1 16.74,5.25 ; J26.1 16.74,3.75
  BOTTOM w0.254: 77.44,43.79 U4.TAB ; U4.TAB v1(77.44,44.79) 76.06,44.79 76.05,44.78 ; U4.TAB v1(79.35,44.79) ; U4.TAB v1(78.38,44.81) ; U4.TAB 76.49,43.79 ; 73.74,43.28 U5.4 ; U5.4 74.55,44.17 v1(74.56,44.16) ; U5.4 73.16,43.28 ; U5.4 73.55,44.36 C32.1 ; v1(65.19,76.59) 65.33,76.73 ; 65.33,76.73 65.38,76.78 65.89,76.78 ; 65.33,76.73 65.41,76.65 65.41,76.61 65.7,76.33 66.08,76.33 66.15,76.4 U7.PAD 65.89,76.78 ; v1(62.47,58.04) 62.43,58.04 62.42,58.05 C5.1 ; C9.1 75.3,75.26 C8.1 76.31,75.29 v1(76.53,75.07) ; C33.1 72.45,36.03 73.06,35.42 ; v1(68.03,63.37) 67.57,63.37 67.44,63.25 66.69,63.25 66.23,63.7 C2.1 C1.1 ; C31.1 62.66,52.98 C30.1 64.59,52.98 v1(64.9,52.68) ; 73.06,35.42 v1(73.06,35.05) ; 73.06,35.42 73.1,35.42 R52.1 ; 65.89,76.78 65.87,76.8 U7.3 ; U4.2 79.13,38.49 ; U4.2 77.63,38.49 ; U4.2 78.38,39.5 ; C32.1 74.28,45.01 ; C32.1 74.28,45.39 ; v1(66.11,58.72) 66.11,58.59 65.49,57.98 C15.1 C14.1 ; C12.1 C13.1 75.01,67.06 75.15,67.2 v1(75.15,67.23) 75.27,67.11 76.5,67.11 R60.1 ; v1(54.65,6.9) 54.62,6.9 54.61,6.88 R25.1 52.54,6.88 52.51,6.86 R51.1 R50.1 47.47,6.86 47.45,6.88 R49.1 R48.1 42.37,6.88 42.33,6.92 R47.1 R46.1 37.3,6.92 37.27,6.95 R45.1
  BOTTOM w0.508: 78.37,43.33 78.38,43.35 U4.TAB ; v1(67.18,4.06) 66.97,4.27 U2.6
  BOTTOM w0.762: v1(78.36,39.73) 78.36,38.52 U4.2 78.38,37.63 ; 78.38,37.63 78.38,37.33 C29.1 ; 78.38,37.63 77.86,37.11 C26.1
  vias: v1(64.95,82.52) v1(71.13,42.81) v1(71.13,42.02) v1(71.13,41.23) v1(71.13,40.44) v1(71.91,42.81) v1(71.91,42.02) v1(71.91,41.23) v1(71.91,40.44) v1(72.7,42.81) v1(72.7,42.02) v1(72.7,41.23) v1(72.7,40.44) v1(73.49,42.81) v1(73.49,42.02) v1(73.49,41.23) v1(73.49,40.44) v1(74.27,42.81) v1(74.27,42.02) v1(74.27,41.23) v1(74.27,40.44)
VBATT: length 70.8
  BOTTOM w0.254: R57.2 50.53,21.45 50.5,21.49
  BOTTOM w0.381: 42.11,46.99 J14.6
  BOTTOM w0.508: J14.6 41,45.82 41,30.99 50.5,21.49 ; R57.2 51.55,21.45 51.59,21.49 86.21,21.49 86.25,21.45 87.13,21.45 J8.45 90.8,20.32
AN00: length 75.4
  TOP w0.203: J12.22 21.44,14.38 44.14,14.38 61.1,31.34 61.45,31.34 v1(61.9,31.79) ; v1(67.5,36.89) 67.49,36.91 U1.1
  BOTTOM w0.203: v1(67.5,36.89) 65.37,34.76 64.77,34.76 62.35,32.34 62.35,32.24 v1(61.9,31.79)
AN01: length 80.9
  TOP w0.203: v1(66.98,35.27) 67.43,35.72 68.51,36.8 68.51,39.29 68.46,39.34 68.46,43.91 68.51,43.96 68.51,48.01 68.59,48.1 68.59,50.55 68.41,50.73 67.53,50.73 U1.2 ; v1(61.63,30.47) 60.96,30.47 44.46,13.97 19.3,13.97 J12.24
  BOTTOM w0.203: v1(66.98,35.27) 66.53,34.82 62.62,30.92 62.08,30.92 v1(61.63,30.47)
AN10: length 85.4
  TOP w0.203: U1.3 68.59,51.27 69,50.87 69,47.93 68.92,47.84 68.92,43.79 68.86,43.74 68.86,39.51 68.92,39.46 68.92,36.02 v1(68.06,35.17) ; J12.26 17.17,13.56 44.89,13.56 60.84,29.51 v1(61.09,29.51)
  BOTTOM w0.203: v1(61.09,29.51) 62.4,29.51 67.6,34.72 67.61,34.72 v1(68.06,35.17)
AN11: length 89.7
  TOP w0.203: U1.4 68.67,51.77 69.32,51.12 69.41,51.04 69.41,47.76 69.32,47.67 69.32,43.63 69.27,43.58 69.27,39.68 69.32,39.63 69.32,35.53 v1(67.09,33.3) ; v1(61.71,28.68) 60.58,28.68 45.06,13.16 15.04,13.16 J12.28
  BOTTOM w0.203: v1(67.09,33.3) 62.47,28.68 v1(61.71,28.68)
AN20: length 97.3
  TOP w0.203: v1(61.85,27.62) 61.21,27.62 61.21,27.61 60.09,27.61 46.74,14.26 46.74,11.47 46.14,10.87 14.78,10.87 J12.30 ; U1.5 68.74,52.27 69.73,51.29 69.81,51.2 69.81,47.59 69.73,47.51 69.73,43.46 69.68,43.41 69.68,39.84 69.73,39.79 69.73,34.9 v1(68.59,33.77)
  BOTTOM w0.203: v1(68.59,33.77) 62.89,28.07 62.89,28.03 62.48,27.62 v1(61.85,27.62)
AN21: length 101.6
  TOP w0.203: v1(60.78,26.95) 60.2,26.95 60.19,26.94 60.01,26.94 47.14,14.07 47.14,11.3 46.31,10.46 12.65,10.46 J12.32 ; v1(67.2,31.39) 70.14,34.34 70.14,35.55 70.13,35.56 70.13,39.96 70.08,40.01 70.08,43.24 70.13,43.29 70.13,47.34 70.22,47.42 70.22,51.37 68.82,52.77 U1.6
  BOTTOM w0.203: v1(60.78,26.95) 62.75,26.95 v1(67.2,31.39)
AN30: length 36.2
  TOP w0.203: U1.7 65.2,53.27 65.16,53.31 64.63,53.31 64.59,53.27 60.44,53.27 57.5,50.34 57.5,50.3 v1(57.05,49.86)
  BOTTOM w0.203: J14.12 57.05,46.63 57.05,49.22 57.05,49.22 v1(57.05,49.86)
AN31: length 34.4
  TOP w0.203: U1.8 60.11,53.77 56.92,50.58 56.88,50.58 56.44,50.14 56.44,50.11 56.06,49.72 v1(55.86,49.72)
  BOTTOM w0.203: v1(55.86,49.72) 55.86,47.99 J14.11
AN40: length 33.6
  TOP w0.203: U1.12 61.18,55.77 56.59,51.18 56.58,51.18 v1(56.13,50.73)
  BOTTOM w0.203: v1(56.13,50.73) 55.41,50.73 42.88,38.2 42.88,37.55 J14.10
AN41: length 32.4
  TOP w0.203: v1(51.73,48.93) 52.18,49.38 52.29,49.38 52.39,49.48 54.05,49.48 55.44,50.86 55.44,50.93 55.92,51.42 55.99,51.42 60.85,56.27 U1.13
  BOTTOM w0.203: v1(51.73,48.93) J14.9
AUXVCC1: length 15.2
  TOP w0.203: U1.22 69.47,60.77 69.47,60.77 71.04,60.77 73.39,63.12 73.39,63.92 ; J1.1 73.39,63.92 ; 73.39,63.92 73.33,63.98 v1(72.81,63.98)
  BOTTOM w0.203: C13.2 C12.2 72.81,64.63 v1(72.81,63.98)
AUXVCC2: length 18
  TOP w0.203: C11.2 C10.2 72.16,60.63 ; J1.3 74.41,69.98 74.41,62.88 72.16,60.63 ; 72.16,60.63 71.81,60.27 U1.21
AUXVCC3: length 24.1
  TOP w0.203: U1.29 64.13,64.13 64.13,63.25 64.31,63.07 66.18,63.07 66.58,63.47 66.7,63.47 v1(67.15,63.92) ; J1.5 74.16,74.3 R61.1
  BOTTOM w0.203: C9.2 74.64,72.29 J1.5 ; C8.2 73.55,73.69 J1.5 ; v1(67.15,63.92) 68.4,65.18 70,65.18 71.87,67.04 71.87,72.01 J1.5
BATT_POS: length 21.7
  TOP w0.203: R56.2 92.67,31.97 91.82,32.82 91.82,33.53 90.8,34.54 90.8,35.56
  TOP w0.508: J8.33 90.8,35.56
  BOTTOM w0.635: J9.3 79.96,32.87 81,32.87 82.46,34.33 87.03,34.33 J8.33
BCR_OUT: length 22.8
  BOTTOM w0.635: J9.4 J9.2 82.6,26.56 82.67,26.63 87.03,26.63 J8.41 ; J8.41 90.8,25.4 90.8,22.86 J8.43 J8.41
BURN: length 10.3
  TOP w0.203: R55.2 84.3,70 J7.5
BUS-INT0: length 8.4
  BOTTOM w0.203: 75.82,63.5 77.64,63.5 80.18,66.04 J7.9
BUS-INT1: length 11.5
  BOTTOM w0.203: 85.72,66.04 84.62,66.04 83.61,65.02 80.87,65.02 78.08,62.23 75.82,62.23
BUS-INT2: length 8.4
  BOTTOM w0.203: 75.82,60.96 78.18,60.96 80.73,63.51 82.16,63.51 82.17,63.5 J7.11
BUS-INT3: length 11.5
  BOTTOM w0.203: 85.72,63.5 84.62,63.5 83.61,62.48 81.06,62.48 78.27,59.69 75.82,59.69
BUS-INT4: length 8.4
  BOTTOM w0.203: 75.82,58.42 76.11,58.42 76.91,59.22 80.07,59.22 81.81,60.96 J7.13
BUS-INT5: length 11.7
  BOTTOM w0.203: 75.82,57.15 80.67,57.15 82.16,58.63 82.16,58.99 82.85,59.69 83.35,59.69 84.62,60.96 85.72,60.96
BUS-INT6: length 8.4
  BOTTOM w0.203: J7.15 81.45,56.68 77.33,56.68 76.53,55.88 75.82,55.88
BUS-INT7: length 11.6
  BOTTOM w0.203: 75.82,54.61 80.67,54.61 81.89,55.83 81.89,56.02 82.76,56.9 84.2,56.9 85.72,58.42
D-BUS0: length 11.9
  TOP w0.203: R10.1 80.7,53.51 81.39,54.2 81.51,54.2 J7.17
  BOTTOM w0.203: 75.82,53.34 80.64,53.34 J7.17
D-BUS1: length 20
  TOP w0.203: R11.1 80.64,61.96 82.84,59.77 83.28,59.77 84.59,58.45 84.59,57.01 85.72,55.88
  BOTTOM w0.203: 75.82,52.07 80.1,52.07 82.72,54.69 84.53,54.69 85.72,55.88
D-BUS2: length 7.7
  BOTTOM w0.203: J7.21 81.18,50.8 80.82,51.16 79.96,51.16 79.6,50.8 75.82,50.8
D-BUS3: length 10.8
  BOTTOM w0.203: 85.72,50.8 84.45,49.53 81.21,49.53 80.79,49.11 79.97,49.11 79.55,49.53 75.82,49.53
D-BUS4: length 7.7
  BOTTOM w0.203: J7.23 81.6,48.26 81.2,48.65 79.53,48.65 79.13,48.26 75.82,48.26
DUMMY_LOAD: length 23.3
  TOP w0.381: J9.6 74.94,27.85 v1(81.42,27.85) ; 90.8,30.48 J8.37
  BOTTOM w0.381: J8.37 87.16,29.38 82.94,29.38 v1(81.42,27.85) ; J24.1 73.65,24.61 J9.6
I2C-ON: length 34.5
  BOTTOM w0.203: 85.72,48.26 84.62,48.26 83.61,47.24 82.97,47.24 81.47,45.75 81.47,36.17 81.29,35.99 80.11,35.99 78.78,34.66 78.78,33.12 77.34,31.69 74.75,31.69 72.07,29.01 J23.1
MEM-SPI0: length 116.2
  TOP w0.203: v1(53.84,54.23) 53.29,54.77 U1.66 48.56,54.77 43.21,60.12 43.21,60.97 43.21,60.97 43.21,66.35 38.89,70.66 38.39,70.66 38.38,70.66 10.87,70.66 J13.32 ; v1(61.79,10.55) 58.66,13.68 58.66,21.19 58.68,21.2 58.68,23.47 58.66,23.48 v1(58.66,24.12)
  BOTTOM w0.203: v1(53.84,54.23) 53.91,54.15 54.39,54.15 54.96,53.58 54.96,53.58 58.68,49.86 58.68,25.12 58.66,25.11 v1(58.66,24.12) ; v1(61.79,10.55) 63.67,8.67 U2.3
MEM-SPI1: length 114.1
  TOP w0.203: v1(53.05,56.16) 53.05,56.07 52.75,55.77 U1.64 48.71,55.77 44.02,60.46 44.02,66.68 39.23,71.48 15.14,71.48 J13.28 ; v1(62.38,12.71) 60.26,14.83 v1(60.26,26.03)
  BOTTOM w0.203: U2.7 68.07,7.02 v1(62.38,12.71) ; v1(53.05,56.16) 53.87,56.16 54.41,55.62 54.41,55.53 60.11,49.83 60.11,26.18 v1(60.26,26.03)
MEM-SPI2: length 115
  TOP w0.203: v1(59.5,25.04) 59.5,24.41 59.5,24.41 59.5,15.89 59.5,15.89 59.5,14.43 v1(62.57,11.35) ; J13.30 13,71.07 38.55,71.07 38.55,71.07 39.06,71.07 43.61,66.51 43.61,60.29 48.63,55.27 U1.65 53,55.27 53.11,55.38 v1(53.74,55.38)
  BOTTOM w0.203: v1(62.57,11.35) 65.87,8.06 U2.5 ; v1(59.5,25.04) 59.5,25.92 59.48,25.94 59.48,26.46 59.5,26.48 59.5,49.63 54.19,54.94 v1(53.74,55.38)
P7.0: length 75.2
  TOP w0.203: 61.54,48.37 U1.92 61.59,37.28 61.45,37.14 61.45,36.62 61.59,36.48 61.59,33.55 43.63,15.6 27.84,15.6 J12.16
  BOTTOM w0.203: J11.2 31.55,11.89 J12.16
P7.1: length 71.7
  TOP w0.203: J12.14 29.97,16 43.46,16 61.09,33.63 61.09,36.41 61.05,36.45 61.05,37.31 61.09,37.35 U1.91
  BOTTOM w0.203: J12.14 32.35,13.63 36.36,13.63 J11.4
P7.2: length 68.2
  TOP w0.203: J12.12 32.11,16.41 43.3,16.41 60.59,33.7 U1.90
  BOTTOM w0.203: J11.6 37.77,14.76 33.76,14.76 J12.12
P7.3: length 64.8
  TOP w0.203: U1.89 60.09,33.78 43.13,16.81 34.24,16.81 J12.10
  BOTTOM w0.203: J12.10 35.7,15.35 39.71,15.35 J11.8
P7.4: length 61.4
  TOP w0.203: U1.88 59.59,33.85 42.96,17.22 36.37,17.22 J12.8
  BOTTOM w0.203: J11.10 41.41,16.19 37.4,16.19 J12.8
P7.5: length 57.9
  TOP w0.203: U1.87 59.09,33.93 42.79,17.63 38.51,17.63 J12.6
  BOTTOM w0.203: J12.6 39.26,16.88 43.27,16.88 J11.12
P7.6: length 54.5
  TOP w0.203: J12.4 40.64,18.03 42.62,18.03 58.59,34 U1.86
  BOTTOM w0.203: J12.4 41.06,17.61 45.07,17.61 J11.14
P7.7: length 50.1
  TOP w0.203: J12.2 58.09,34.97 U1.85
  BOTTOM w0.203: J12.2 46.18,19.05 J11.16
P8.0: length 79.1
  TOP w0.203: v1(62.23,26.15) 62.68,26.6 62.68,33.31 62.59,33.4 ; 62.59,33.4 60.93,31.75 43.97,14.78 26.11,14.78 J12.18 ; 62.59,33.4 62.59,36.48 62.72,36.62 62.72,37.14 62.59,37.28 U1.94
  BOTTOM w0.203: J25.4 66.64,26.15 v1(62.23,26.15)
P8.1: length 84.7
  TOP w0.203: v1(66.33,36.92) 66.33,36.28 66.17,36.12 66.17,30.04 67.68,28.54 68.43,28.54 69.45,27.52 J25.2 ; J12.20 20.32,20.07 22.45,20.07 23.13,19.39 23.13,18.8 26.52,15.41 26.52,15.39 26.72,15.19 43.8,15.19 62.09,33.48 v1(62.09,36.88) U1.93
  BOTTOM w0.203: v1(66.33,36.92) 65.7,36.92 65.67,36.89 62.74,36.89 62.72,36.88 v1(62.09,36.88)
P10: length 52.1
  TOP w0.203: U1.37 60.09,72.2 58.82,73.48 58.82,73.49 56.3,76.01 56.3,76.01 49.19,83.12 24.96,83.12 J13.17
P11: length 56.1
  TOP w0.203: U1.36 60.59,72.28 59.22,73.64 59.22,73.66 56.47,76.42 56.47,76.42 49.35,83.53 21.81,83.53 19.3,81.03 J13.19
P12: length 58.9
  TOP w0.203: U1.35 61.09,72.35 59.63,73.81 59.63,73.83 56.64,76.82 56.64,76.82 50.41,83.05 49.52,83.93 48.36,83.93 20.69,83.93 J13.21
P13: length 62.4
  TOP w0.203: J13.23 15.33,80.01 19.66,84.34 48.27,84.34 49.69,84.34 50.92,83.12 56.8,77.23 56.81,77.23 60.04,74 60.04,73.98 61.59,72.43 U1.34
P14: length 65.8
  TOP w0.203: U1.33 62.09,72.5 60.44,74.15 60.44,74.17 57.63,76.98 56.97,77.64 56.97,77.64 52.39,82.22 49.86,84.75 48.71,84.75 48.1,84.75 16.42,84.75 J13.25
P15: length 69.2
  TOP w0.203: J13.27 14.29,85.15 47.93,85.15 47.93,85.15 48.54,85.15 50.03,85.15 53.94,81.24 57.14,78.04 57.14,78.04 58.03,77.15 62.59,72.6 U1.32
P16: length 71
  TOP w0.203: U1.40 58.59,70.74 58.54,70.79 58.54,72.87 v1(58.09,73.32) ; J13.29 12.15,85.56 47.76,85.56 48.37,85.56 49.14,85.56 50.68,85.56 v1(57.73,78.51)
  BOTTOM w0.203: v1(57.73,78.51) 57.73,77.88 58.09,77.52 v1(58.09,73.32)
P17: length 66
  TOP w0.203: J13.31 5.17,80.01 6.18,78.99 42.47,78.99 46.71,74.76 46.71,74.39 v1(47.16,73.94) ; U1.41 58.09,72.35 56.94,73.5 56.94,73.76 v1(56.49,74.21)
  BOTTOM w0.203: v1(47.16,73.94) 48.22,73.94 48.49,74.21 v1(56.49,74.21)
P20: length 65.1
  TOP w0.203: J13.15 27.08,82.7 45.3,82.7 45.97,82.7 46.9,82.7 56.71,72.89 57.59,72.01 U1.42 57.59,63 57.84,62.75 v1(58.47,62.75)
  BOTTOM w0.203: v1(58.47,62.75) 59.11,62.75 59.12,62.74 70.6,62.74 71.18,62.15 72.02,62.15 73.37,63.5 R35.2
P21: length 63
  TOP w0.203: v1(61.34,62.03) 57.96,62.03 57.09,62.9 U1.43 57.09,71.94 56.31,72.72 46.73,82.3 45.47,82.3 45.47,82.3 29.21,82.3 J13.13
  BOTTOM w0.203: R32.2 72.67,62.23 72.19,61.75 71.01,61.75 70.53,62.23 67.6,62.23 66.96,61.58 66.96,61.51 66.56,61.11 62.26,61.11 v1(61.34,62.03)
P22: length 59.9
  TOP w0.203: v1(59.69,61.37) 57.49,61.37 56.66,62.2 56.66,63.07 56.59,63.14 U1.44 56.59,71.86 55.9,72.55 55.9,72.55 55.06,73.39 46.56,81.89 45.64,81.89 31.34,81.89 J13.11
  BOTTOM w0.203: v1(59.69,61.37) 60.35,60.71 66.88,60.71 67.13,60.96 R33.2
P23: length 59.8
  TOP w0.203: J13.9 33.48,81.48 46.39,81.48 54.65,73.22 55.49,72.38 56.09,71.79 U1.45 56.09,63.06 56.25,62.9 56.25,61.72 57.38,60.58 57.68,60.58 v1(58.13,60.13)
  BOTTOM w0.203: v1(58.13,60.13) 58.58,59.69 58.58,59.32 60.71,57.19 71.18,57.19 73.69,59.69 R36.2
P24: length 56.8
  TOP w0.203: v1(56.17,60.89) 55.18,61.89 55.18,62.18 54.98,62.38 54.98,62.96 55.09,63.07 U1.47 55.09,72.21 54.25,73.05 46.22,81.08 35.61,81.08 J13.7
  BOTTOM w0.203: R37.2 73.25,58.42 71.62,56.78 60.29,56.78 v1(56.17,60.89)
P25: length 54.2
  TOP w0.203: v1(54.54,61.92) 54.54,62.5 54.55,62.51 54.55,63.03 54.59,63.07 U1.48 54.59,68.25 54.67,68.33 54.67,72.05 53.84,72.89 46.96,79.76 46.63,79.76 v1(46.13,80.26)
  BOTTOM w0.203: R34.2 73.25,57.15 72.48,56.38 59.86,56.38 59.08,57.15 59.08,57.17 58.23,58.01 58.22,58.01 55.98,60.26 55.91,60.26 55.54,60.63 55.54,60.7 54.95,61.28 54.95,61.5 v1(54.54,61.92) ; v1(46.13,80.26) 45.36,81.03 38.1,81.03 J13.5
P26: length 51.1
  TOP w0.203: v1(53.71,62.73) 53.71,62.74 54.09,63.12 U1.49 54.09,68.32 54.27,68.5 54.27,71.88 47.18,78.97 v1(46.29,78.97)
  BOTTOM w0.203: J13.3 40.67,78.97 v1(46.29,78.97) ; R38.2 73.25,55.88 73.16,55.97 59.69,55.97 58.67,56.98 58.67,57 58.06,57.61 58.05,57.61 55.81,59.85 55.74,59.85 55.13,60.46 55.13,60.53 54.38,61.28 54.28,61.28 53.86,61.7 53.86,61.94 53.71,62.09 v1(53.71,62.73)
P27: length 47.6
  TOP w0.203: J13.1 47.57,74.6 49.7,72.48 49.7,70.63 50.24,70.08 50.99,70.08 51.94,69.13 51.94,66.47 53.59,64.82 U1.50 53.28,63.86 53.28,63.86 v1(53.01,63.59)
  BOTTOM w0.203: v1(53.01,63.59) 53.01,62.16 53.45,61.71 53.45,61.53 54.11,60.88 54.21,60.88 54.73,60.36 54.73,60.29 55.57,59.45 55.64,59.45 57.88,57.2 57.9,57.2 58.27,56.83 58.27,56.82 59.52,55.56 60.2,55.56 69.71,55.56 70.66,54.61 R39.2
P30: length 47.7
  TOP w0.203: J13.2 42.16,76.01 45.97,72.2 49.33,68.85 49.33,68.39 49.33,66.58 49.33,65.95 51.69,63.59 U1.51 53.26,62.27 53.45,62.09 53.49,62.09 53.91,61.68 53.91,61.65 54.28,61.28 54.3,61.28 56.5,59.08 56.5,58.44 56.63,58.31 v1(56.63,57.42)
  BOTTOM w0.203: R41.2 73.25,53.34 71.96,52.04 61.16,52.04 56.63,56.58 v1(56.63,57.42)
P31: length 49.7
  TOP w0.203: J13.4 40.69,76.4 41.19,76.4 45.8,71.79 48.92,68.68 48.92,67.96 48.92,67.96 48.92,67.43 48.92,67.43 48.92,66.75 48.92,65.41 48.92,63.55 50.69,61.77 U1.52 53.19,61.77 53.28,61.68 53.3,61.68 54.11,60.88 54.13,60.88 55.89,59.12 v1(55.89,58.15)
  BOTTOM w0.203: R42.2 73.25,52.07 72.82,51.64 60.99,51.64 55.85,56.78 55.85,57.47 55.89,57.52 v1(55.89,58.15)
P32: length 52.4
  TOP w0.203: v1(54.84,58.57) 54.84,59.2 54.88,59.24 54.88,59.56 53.96,60.47 53.94,60.47 53.14,61.27 U1.53 50.62,61.27 48.51,63.38 48.51,65.57 48.51,66.92 48.51,68.51 45.64,71.39 41.03,76 38.56,76 J13.6
  BOTTOM w0.203: v1(54.84,58.57) 54.84,58.27 55.31,57.8 55.31,56.75 60.3,51.76 61.26,50.8 R43.2
P33: length 55.5
  TOP w0.203: J13.8 36.42,75.59 37.59,75.59 40.86,75.59 45.47,70.98 48.11,68.34 48.11,67.09 48.11,65.74 48.11,63.21 50.54,60.77 U1.54 53.06,60.77 54.12,59.71 54.12,58.09 54.65,57.56 54.66,57.56 v1(54.67,57.54)
  BOTTOM w0.203: R40.2 61.95,49.53 60.6,50.88 54.67,56.81 v1(54.67,57.54)
P34: length 58.5
  TOP w0.203: v1(53.72,57.05) 53.72,57.82 53.71,57.83 53.71,59.35 52.79,60.27 U1.55 50.47,60.27 47.7,63.04 47.7,65.91 47.7,67.26 47.7,68.17 45.3,70.58 45.3,70.58 40.69,75.18 37.75,75.18 34.29,75.18 J13.10
  BOTTOM w0.203: v1(53.72,57.05) 62.52,48.25 71.72,48.25 71.75,48.22 72.27,48.22 72.31,48.26 R44.2
P37: length 38.7
  TOP w0.203: J13.16 27.89,73.96 38.26,73.96 38.26,73.97 40.18,73.97 44.79,69.36 46.48,67.67 46.48,66.42 46.48,63.03 46.48,62.36 46.48,62.36 46.48,61.46 49.17,58.77 U1.58
P40: length 41.4
  TOP w0.203: U1.59 49.08,58.27 46.08,61.28 46.08,62.53 46.08,63.2 46.08,66.58 46.08,67.5 44.63,68.95 40.02,73.56 38.43,73.56 25.76,73.56 J13.18
P41: length 44.2
  TOP w0.203: J13.20 23.62,73.15 38.6,73.15 39.85,73.15 44.46,68.54 44.46,68.54 45.67,67.33 45.67,63.37 45.67,63.37 45.67,62.69 45.67,62.02 45.67,61.11 49,57.77 U1.60
P42: length 46.9
  TOP w0.203: U1.61 48.93,57.27 45.26,60.94 45.26,62.19 45.26,62.86 45.26,63.54 45.26,67.16 44.29,68.14 39.68,72.75 38.77,72.75 38.76,72.75 21.49,72.75 J13.22
P43: length 49.7
  TOP w0.203: U1.62 48.85,56.77 44.84,60.78 44.84,67.01 39.51,72.34 19.35,72.34 J13.24
P44: length 52.4
  TOP w0.203: J13.26 17.22,71.93 39.34,71.93 44.44,66.84 44.44,60.62 48.78,56.27 U1.63
P51: length 69.2
  TOP w0.203: U1.68 47.84,53.77 45.1,51.03 45.1,32.57 40.62,28.09 13.11,28.09 J12.29
P52: length 66.5
  TOP w0.203: J12.27 15.24,27.69 40.11,27.69 40.79,27.69 45.5,32.4 45.5,50.84 47.94,53.27 U1.69
P53: length 63.7
  TOP w0.203: J12.25 17.37,27.28 39.95,27.28 40.96,27.28 45.92,32.25 45.92,50.65 48.05,52.77 U1.70
P54: length 60.9
  TOP w0.203: J12.23 19.51,26.87 39.78,26.87 39.78,26.87 41.12,26.87 46.35,32.1 46.35,50.48 48.15,52.27 50.16,52.27 U1.71
P55: length 58.2
  TOP w0.203: U1.72 48.26,51.77 46.82,50.34 46.82,49.64 46.82,32 41.24,26.42 21.59,26.42 J12.21
P56: length 55.4
  TOP w0.203: J12.19 23.72,26.01 41.41,26.01 47.23,31.83 47.23,50.15 48.35,51.27 U1.73
P57: length 52.7
  TOP w0.203: U1.74 48.44,50.77 47.96,50.29 47.64,49.97 47.64,31.66 41.53,25.55 25.81,25.55 J12.17
P60: length 33.2
  TOP w0.203: U1.84 57.59,37.01 J12.1
P61: length 35.2
  TOP w0.203: U1.83 57.09,37.09 42.61,22.61 40.64,22.61 J12.3
P62: length 37.2
  TOP w0.203: J12.5 38.51,23.01 42.44,23.01 56.59,37.16 U1.82
P63: length 39.2
  TOP w0.203: J12.7 36.37,23.42 42.27,23.42 56.09,37.24 U1.81
P64: length 41.2
  TOP w0.203: U1.80 55.59,37.31 42.13,23.85 34.26,23.85 J12.9
P65: length 43.2
  TOP w0.203: U1.79 55.09,37.39 41.98,24.28 32.16,24.28 J12.11
P66: length 45.2
  TOP w0.203: J12.13 30.07,24.74 41.19,24.74 41.86,24.74 54.59,37.46 U1.78
P67: length 47.1
  TOP w0.203: U1.77 54.09,37.54 41.7,25.15 27.94,25.15 J12.15
P-I2C-SCL: length 13.6
  TOP w0.203: J7.43 79.38,22.86 78.46,23.77 74.66,23.77 74.49,23.6 74.49,22.56 J23.2
P-I2C-SDA: length 19.7
  TOP w0.203: J23.3 70.62,19.05 70.62,23.24 71.56,24.18 81.97,24.18 J7.41
PCM_IN: length 13.7
  TOP w0.508: J8.35 90.8,33.02
  BOTTOM w0.635: J9.1 81.34,31.71 86.96,31.71 J8.35
RESET: length 93.1
  TOP w0.203: 74.89,62.22 74.89,62.13 ; 74.89,62.13 74.89,51.74 v1(72.01,48.86) ; 74.89,62.13 76.4,63.64 Q2.3 ; 68.29,19.37 68.29,21.44 65.59,24.14 U1.100 65.96,48.37 v1(66.47,48.88) ; 68.29,19.37 R1.1 ; 68.29,19.37 68.29,18.16 ; SW1.2 SW1.3 68.26,12.34 68.29,12.37 ; 68.29,12.37 68.29,3.96 67.45,3.12 61.65,3.12 59.73,5.05 J17.1 ; 68.29,12.37 68.29,18.16 ; 68.29,18.16 C6.2
  BOTTOM w0.203: v1(72.01,48.86) 67.13,48.86 67.11,48.88 v1(66.47,48.88)
RST0: length 13.8
  BOTTOM w0.203: J6.2 88.27,78.16 J8.1
RST1: length 14.2
  TOP w0.254: 90.8,76.2 89.37,77.64 88.98,77.64 82.61,84 J6.4
RST2: length 12.3
  BOTTOM w0.203: J8.3 86.92,75.01 85.24,75.01 84.4,75.84 84.4,76.94 J6.6
RST3: length 13.7
  TOP w0.203: 90.8,73.66 89.71,74.75 87.86,74.75 86.94,75.67 86.94,76.72 84.75,78.92 J6.8
RST4: length 11.4
  TOP w0.203: J8.5 86.74,72.64 86.74,74.08 86.15,74.68 82.86,74.68 81.15,76.38 J6.10
RST5: length 12
  BOTTOM w0.203: J6.12 81.28,72.44 89.48,72.44 90.8,71.12
RST6: length 9.5
  BOTTOM w0.203: J8.7 86.82,70.03 82.31,70.03 81.04,71.3 J6.14
RST7: length 11.7
  TOP w0.203: 90.8,68.58 89.79,69.6 82.76,69.6 81.93,68.76 J6.16
RTCAP0: length 35
  TOP w0.203: v1(44.01,52.16) 43.38,51.54 43.38,45.67 J14.7 ; U1.31 63.09,60.99 54.42,52.32 v1(54.42,51.96)
  BOTTOM w0.203: v1(54.42,51.96) 54.21,51.76 53.13,51.76 53.08,51.71 44.45,51.71 v1(44.01,52.16)
RTCAP1: length 37.1
  TOP w0.203: v1(53.47,51.04) 54.39,51.04 55.05,51.7 55.05,52.11 61.42,58.47 61.42,58.74 63.59,60.91 U1.30 ; J14.8 44.02,43.76 v1(44.02,50.93)
  BOTTOM w0.203: v1(53.47,51.04) 52.83,51.04 52.73,50.94 44.67,50.94 44.65,50.93 v1(44.02,50.93)
SEP_SW1: length 17.9
  TOP w0.203: J8.39 86.74,26.42 86.74,24.98 85.85,24.09 85.37,24.09 84.51,23.23 84.51,22.74 83.61,21.84 82.61,21.84 79.97,19.2 76.52,19.2 J24.3
SEP_SW2: length 21.4
  TOP w0.203: J24.5 76.54,18.72 80.06,18.72 82.78,21.44 86,21.44 87.15,22.58 87.15,25.72 88,26.57 89.43,26.57 90.8,27.94
SW_GND: length 18.6
  TOP w0.203: J24.4 J24.2
  BOTTOM w0.203: 90.8,17.78 J8.47 87.25,16.76 82.76,16.76 81.85,17.68 J24.6 J24.4
TCK: length 42.2
  TOP w0.203: J17.5 63.73,8.36 65.09,9.72 U1.99
TDI/TCLK: length 42.7
  TOP w0.203: J17.3 61.73,8.36 64.09,10.72 U1.97
TDO/TDI: length 42.9
  TOP w0.203: U1.96 63.59,19.34 63.59,19.34 63.59,18.81 63.59,11.22 60.73,8.36 J17.2
TMS: length 42.4
  TOP w0.203: U1.98 64.59,10.22 62.73,8.36 J17.4
N00960: length 2.9
  TOP w0.203: J11.15 53.37,9.32 D8.1
N00962: length 2.9
  TOP w0.203: J11.13 50.83,9.32 D7.1
N01405: length 5.1
  BOTTOM w0.203: U7.9 69.55,77.3 70.28,78.03 70.28,79.46 70.29,79.48 R28.1
N05444: length 2.9
  TOP w0.203: D6.1 48.29,9.32 J11.11
N09582: length 2.9
  TOP w0.203: D5.1 45.75,9.32 J11.9
N09723: length 2.9
  TOP w0.203: J11.7 43.21,9.32 D4.1
N09975: length 2.9
  TOP w0.203: D3.1 40.67,9.32 J11.5
N10395: length 2.9
  TOP w0.203: J11.3 38.13,9.32 D2.1
N10583: length 2.9
  TOP w0.203: J11.1 35.59,9.32 D1.1
N20705: length 2.4
  TOP w0.203: v1(53.38,4.24) 53.38,3.01 D8.2
  BOTTOM w0.203: R25.2 v1(53.38,4.24)
N20707: length 2.3
  TOP w0.203: v1(50.81,4.32) 50.81,2.76 D7.2
  BOTTOM w0.203: R51.2 v1(50.81,4.32)
N20709: length 2.3
  TOP w0.203: v1(48.31,4.19) 48.31,2.77 D6.2
  BOTTOM w0.203: R50.2 v1(48.31,4.19)
N20711: length 2.4
  TOP w0.203: v1(45.75,4.34) D5.2
  BOTTOM w0.203: R49.2 v1(45.75,4.34)
N20713: length 2.4
  TOP w0.203: v1(43.21,4.24) D4.2
  BOTTOM w0.203: R48.2 v1(43.21,4.24)
N20715: length 2.4
  TOP w0.203: v1(40.7,4.34) 40.7,2.79 D3.2
  BOTTOM w0.203: R47.2 v1(40.7,4.34)
N20717: length 2.4
  TOP w0.203: v1(38.14,4.29) 38.14,2.76 D2.2
  BOTTOM w0.203: R46.2 v1(38.14,4.29)
N20719: length 2.4
  TOP w0.203: v1(35.61,4.29) 35.61,2.77 D1.2
  BOTTOM w0.203: R45.2 v1(35.61,4.29)
N4790561: length 4.7
  TOP w0.203: U1.28 64.59,65.54 Q1.2 63.59,66.54 63.59,67.58 C23.2
N4790859: length 4.7
  TOP w0.203: U1.27 65.09,65.53 66.09,66.53 Q1.1 66.09,67.48 C22.2
N5907204: length 22.9
  TOP w0.203: Q2.1 77.35,67.73 77.34,67.74 J6.15 ; J6.5 J6.7
  BOTTOM w0.203: J6.5 J6.3 J6.1 ; R60.2 78.31,67.79 J6.15 J6.13 J6.11 J6.9 J6.7
N5929899: length 7.4
  TOP w0.203: J16.2 67.35,80.6 67.26,80.51 v1(67.26,79.88) 67.26,78.88 66.29,77.91 U6.2
  BOTTOM w0.203: U7.5 66.87,79.26 67.26,79.65 v1(67.26,79.88)
N5929949: length 5.3
  TOP w0.203: 66.34,80.53 66.12,80.53 65.71,80.12 U6.3 ; 66.34,80.53 66.34,79.82 v1(66.24,79.71) ; 66.34,80.53 66.34,80.61 66.55,80.82 J16.3
  BOTTOM w0.203: U7.4 66.37,79.57 66.24,79.71 v1(66.24,79.71)
N5932830: length 3.8
  BOTTOM w0.203: U7.23 63.41,75.3 63.19,75.08 63.19,74.1 63.84,73.44 J18.2
N5932842: length 9.1
  BOTTOM w0.203: J18.1 65.25,71.3 63.54,71.3 62.78,72.05 62.78,75.4 63.19,75.8 U7.24
N5932854: length 3.4
  BOTTOM w0.203: J21.2 61.67,77.3 U7.27
N5932866: length 3.6
  BOTTOM w0.203: U7.28 62.19,77.8 J21.1
N5932918: length 12.3
  TOP w0.203: v1(62.28,78.7) 62.28,78.37 61.98,78.07 59.6,78.07 56.17,81.5 J22.2
  BOTTOM w0.203: U7.1 v1(62.28,78.7)
N5932930: length 9
  TOP w0.203: J22.1 59.64,82.3 59.65,82.3 61.61,80.33 61.78,80.33 v1(62.23,79.88)
  BOTTOM w0.203: U7.2 65.37,79.43 64.89,79.91 62.89,79.91 62.86,79.88 v1(62.23,79.88)
N5932942: length 6.2
  BOTTOM w0.203: J20.2 71.01,75.8 U7.12
N5932954: length 4.1
  BOTTOM w0.203: U7.11 69.99,76.3 71.3,77.61 J20.1
N6193207: length 13.8
  BOTTOM w0.203: U7.25 62.86,76.3 57.61,71.06 55.38,71.06 J4.4
N6193209: length 12.9
  BOTTOM w0.203: U7.26 62.78,76.8 57.44,71.46 J4.2
N6197446: length 42
  TOP w0.203: J13.12 32.16,74.78 37.92,74.78 37.92,74.78 40.52,74.78 45.13,70.17 47.3,68 47.3,66.08 47.29,66.08 47.29,62.48 48.59,61.19 49.39,60.39 ; 49.39,60.39 v1(49.43,60.39) ; 49.39,60.39 50,59.77 U1.56
  BOTTOM w0.203: v1(49.43,60.39) 49.43,61.03 49.36,61.1 49.36,67.58 J4.3
N6197448: length 47.7
  TOP w0.203: U1.57 49.65,59.27 48.34,60.59 ; 48.34,60.59 46.89,62.04 46.89,62.86 46.89,66.25 46.89,67.84 44.96,69.76 40.35,74.37 38.09,74.37 30.02,74.37 J13.14 ; 48.34,60.59 48.25,60.59 v1(48.17,60.67)
  BOTTOM w0.203: v1(48.17,60.67) 48.17,68.92 J4.1
N6228204: length 4.9
  BOTTOM w0.762: U4.3 76.1,36.75 C26.2 76.06,35.17 J2.3
N6242345: length 18.7
  TOP w0.203: R54.1 72.47,45.43 v1(72.47,44.17) 71.45,44.17 70.54,43.26 70.54,43.12 70.49,43.07 70.49,40.18 70.54,40.13 70.54,36.3 71.45,35.39 71.45,33.5 J25.3
N6242401: length 1.4
  BOTTOM w0.203: U5.5 73.72,39.2 R52.2
N6242514: length 10.2
  BOTTOM w0.203: U5.8 69.88,39.17 R53.1 69.9,37.58 71.48,36 71.48,30.99 J25.1
N6242904: length 114.8
  TOP w0.203: U6.4 63.72,80.12 v1(64.27,80.68) ; J3.1 80.38,47.62 80.37,47.64
  TOP w0.508: J16.1 68.15,81.1 68.56,80.7 v1(69,80.7) 69.56,80.14 74.32,80.14 76.91,77.55 77.83,77.55 78.71,76.66 78.71,67.42 78.92,67.22 78.92,55.18 77.98,54.24 77.98,50.03 80.37,47.64
  BOTTOM w0.203: 71.2,45.97 71.4,45.77 C32.2 ; v1(69,80.7) 69,78.68 68.77,78.45 U7.8
  BOTTOM w0.508: v1(69,80.7) 67.84,80.7 67.82,80.68 v1(64.27,80.68) 52.43,80.68 42.16,70.42 J14.1 ; 80.37,47.59 80.37,46.47 80.67,46.16 U4.1
  BOTTOM w0.635: 80.37,47.59 J3.1 77.75,47.6 77.37,47.22 72.44,47.22 71.2,45.97 U5.2 U5.1
  BOTTOM w0.762: U4.1 80.67,36.82 C29.2
N6320719: length 17
  TOP w0.508: J8.27 90.8,43.18
  BOTTOM w0.508: J8.27 87.03,41.95 87.03,37.76 86.13,36.86 82.83,36.86 82.03,36.06 82.03,35.94 81.22,35.13 81.11,35.13 J2.1
